# Allegro board CUTIEPI.brd
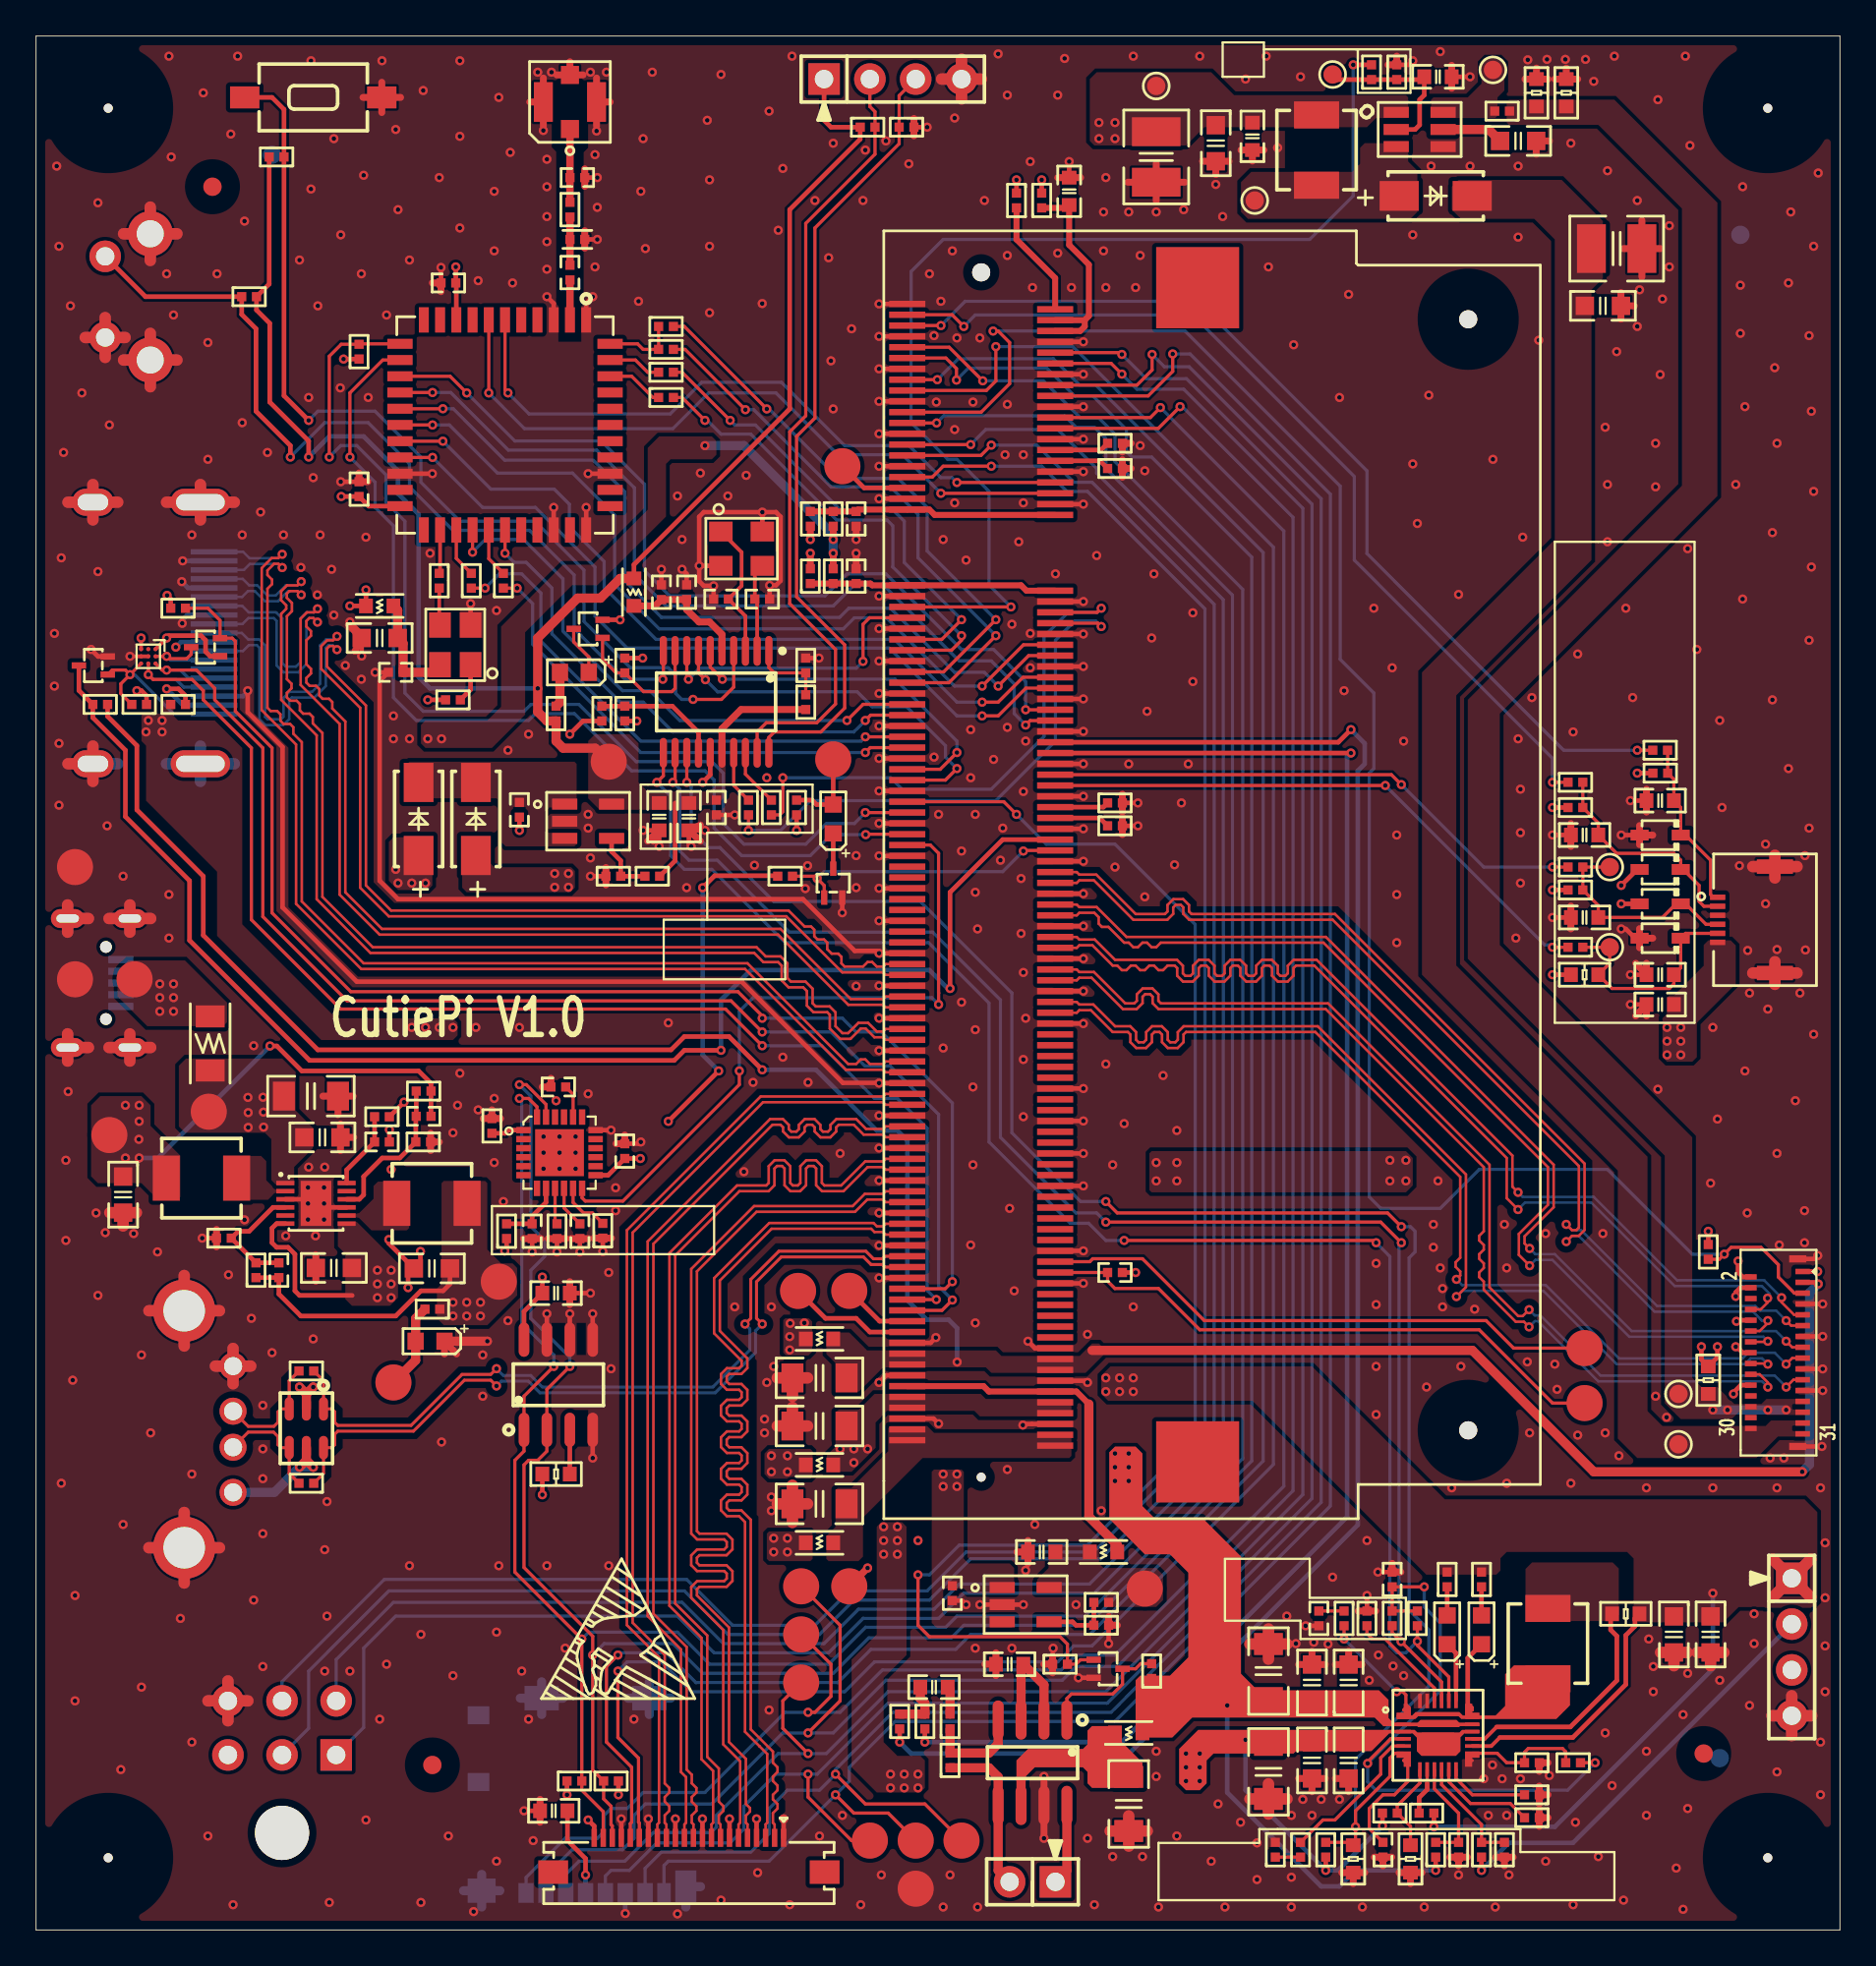
[diagram p0: board, top side]
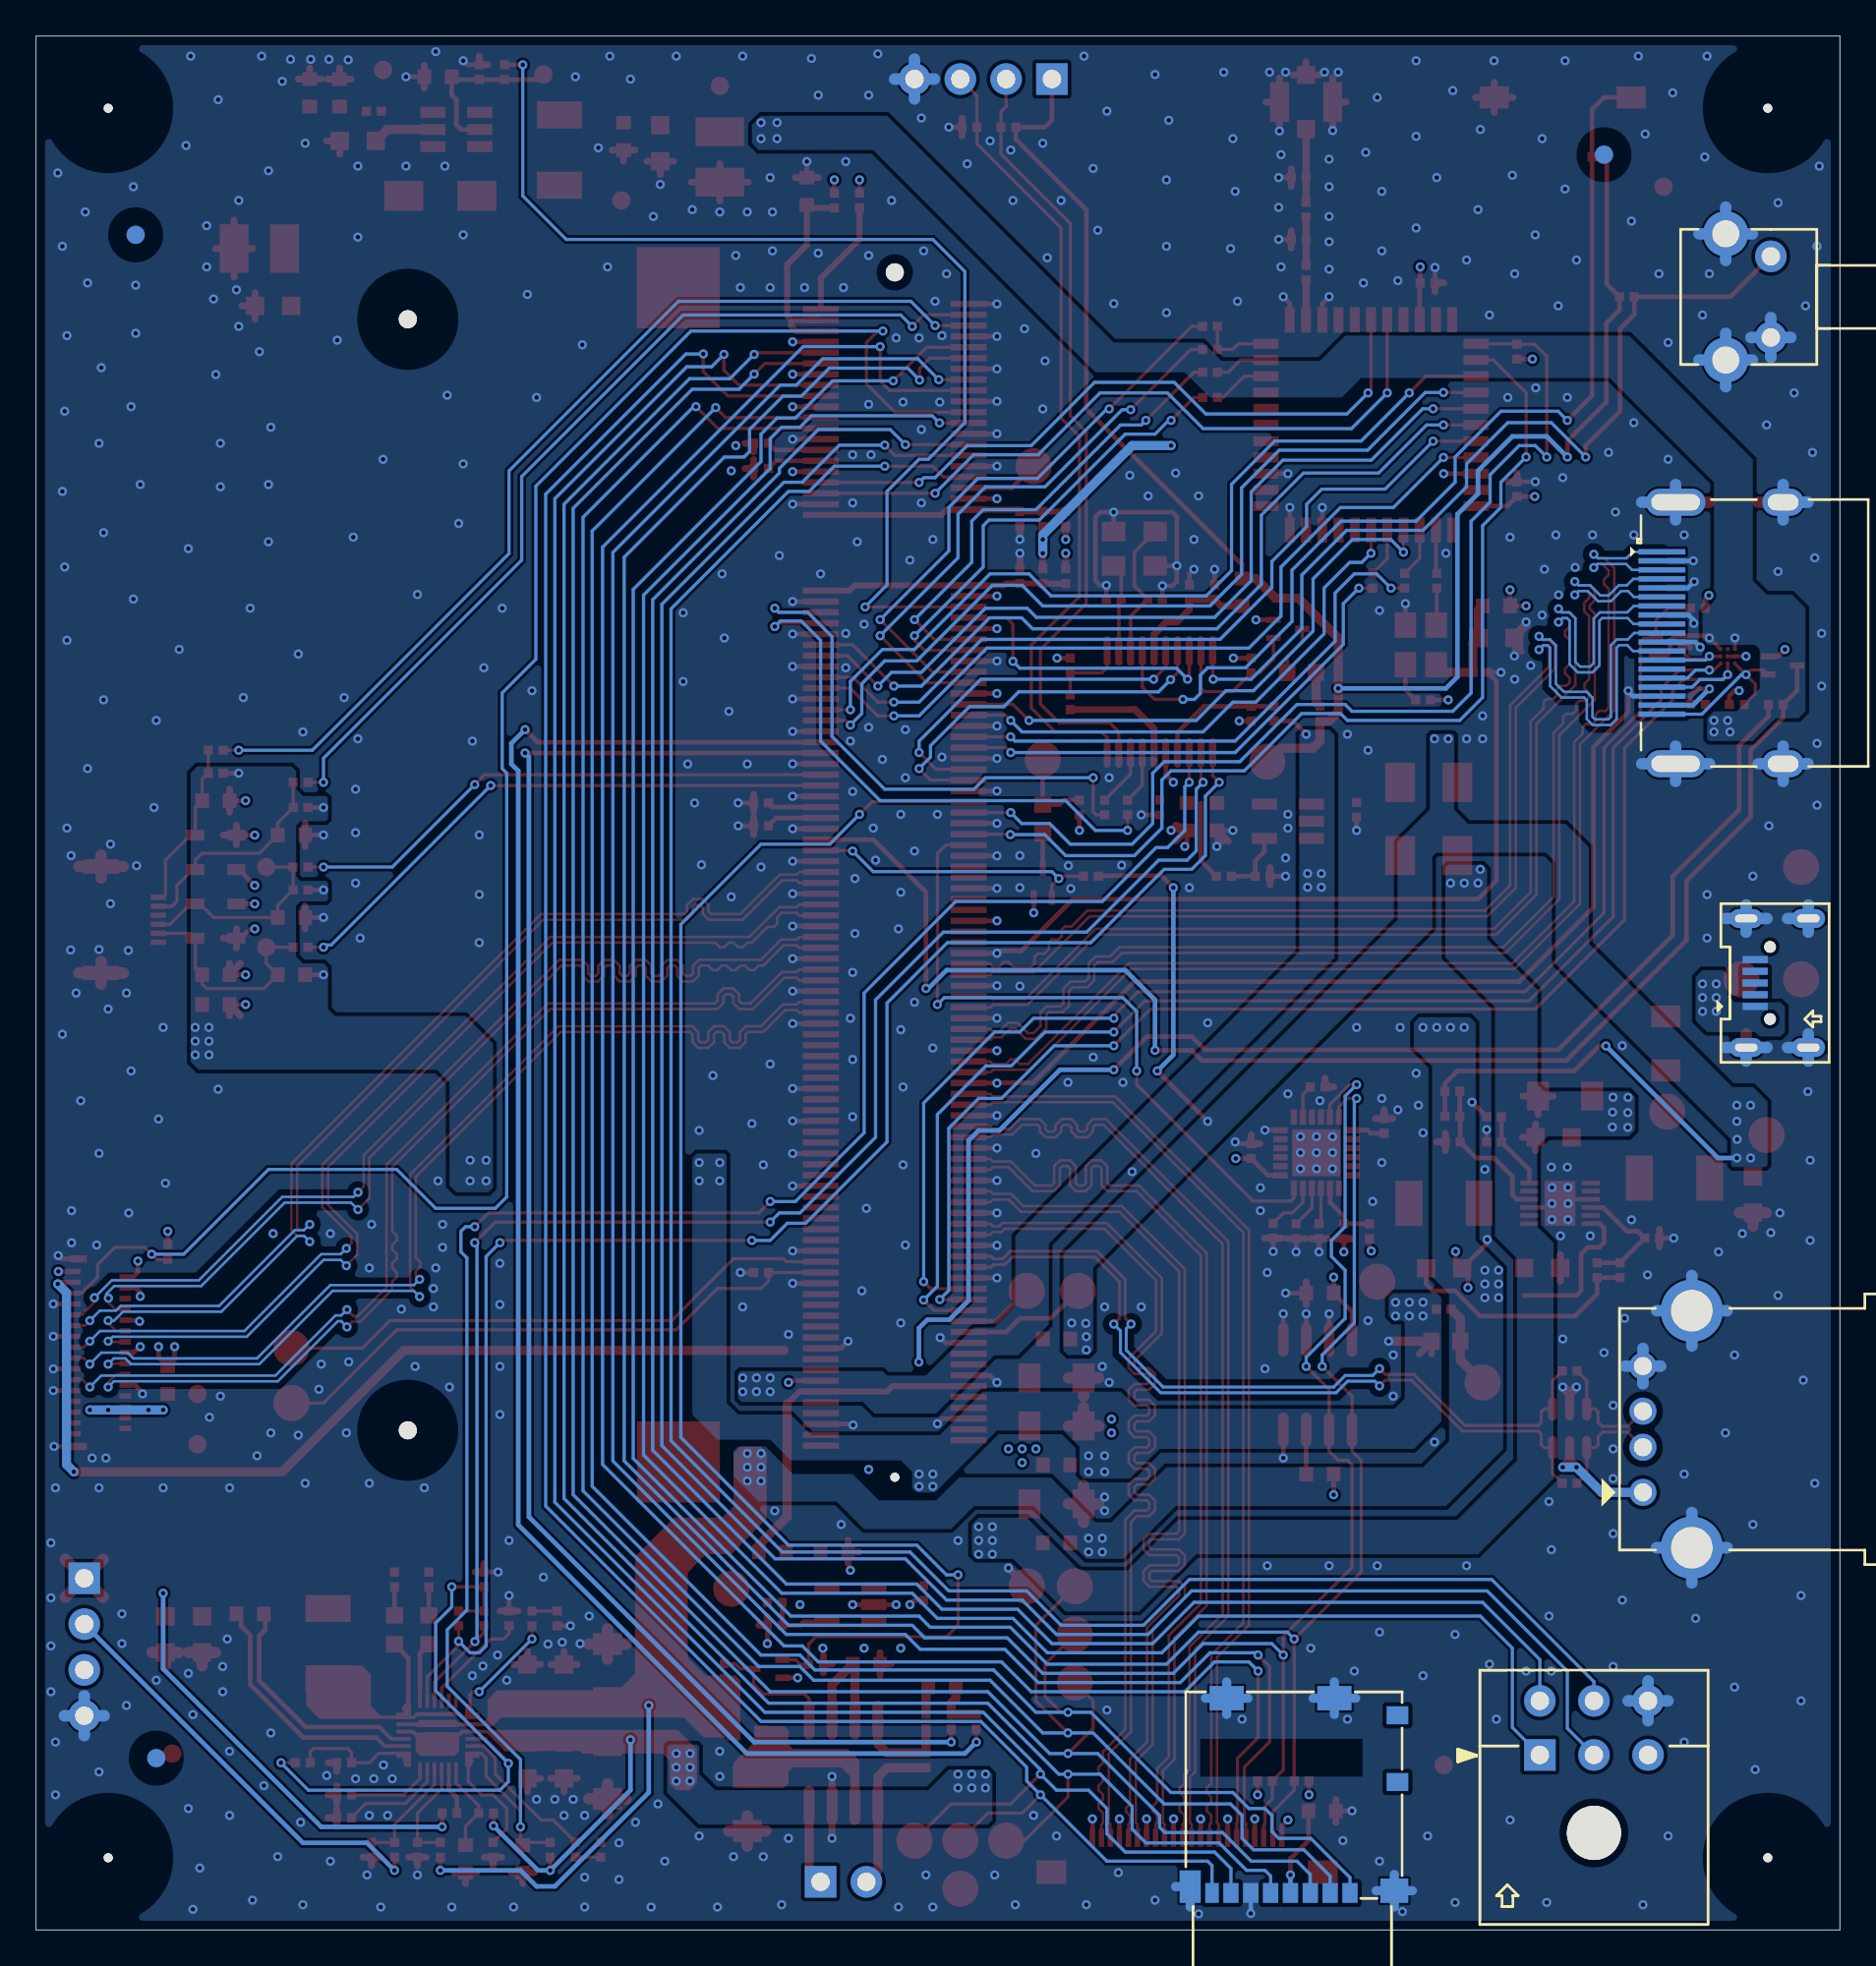
[diagram p1: board, bottom side, seen from below]

Outline 100.01 x 105 mm; copper layers: TOP, GND02, PWR03, BOTTOM. Coordinates in mm from the lower left corner of the outline.
Outline path: 0,105 0,0 100.01,0 100.01,105 0,105

## Design rules (mm)
constraint set DEFAULT: min track width 0.178
net group N12382248: nets N12382248 N12382260
net group PCM_DIN: nets N12389436 PCM_DIN
net group PCM_DOUT: nets N12389362 PCM_DOUT
net group RXD0: nets N12403489 RXD0
net group RXD1: nets N12392882 RXD1
net group TXD0: nets N12403491 TXD0
net group TXD1: nets N12392891 TXD1
net group USB_D: nets USB_DM USB_DP
net group USB_PRE: nets N1475858 N1475995
net group BOOST_EN: nets BOOST_EN CHARGE_EN N12349119
net group CAM: nets CAM1_CN CAM1_CP CAM1_DN0 CAM1_DN1 CAM1_DN2 CAM1_DN3 CAM1_DP0 CAM1_DP1 CAM1_DP2 CAM1_DP3
net group CTS1: nets CTS1 N12392875 RTS1
net group DSI: nets DSI1_CN DSI1_CP DSI1_DN0 DSI1_DN1 DSI1_DN2 DSI1_DN3 DSI1_DP0 DSI1_DP1 DSI1_DP2 DSI1_DP3
net group HDMI: nets HDMI_CK_N HDMI_CK_P HDMI_D0_N HDMI_D0_P HDMI_D1_N HDMI_D1_P HDMI_D2_N HDMI_D2_P
net group POWER: nets CM_VDAC GPIO0-27_VREF GPIO28-45_VREF HDMI_HPD_N_1V8 N12356557 VBAT VBAT_AD VBUSA VDD_CORE VDDA
net group VBUS: nets N12455651

## Placement (name value [footprint] x y rotation side)
C1  47u/6.3V  [C1206]  43.43 23.62 180 top
C2  47u/6.3V  [C1206]  15.24 46.23 0 top
C3  47u/6.3V  [C1206]  43.43 27.94 180 top
C4  1u/10V  [C0402]  50.8 18.67 270 top
C5  4.7u/16V  [C0603]  55.75 20.95 180 top
C6  100n  [C0402]  19.18 43.69 0 top
C7  10u/16V  [C0805]  16.51 36.7 180 top
C8  10u/16V  [C0805]  15.88 43.94 0 top
C10  47u/6.3V  [C1206]  43.43 30.61 180 top
C11  10u/16V  [C0805]  21.95 36.68 180 top
C12  10u/16V  [C0805]  4.83 40.77 270 top
C13  1u/10V  [C0402]  45.47 78.23 270 top
C14  1u/10V  [C0402]  45.47 75.06 90 top
C20  47u/6.3V  [C1206]  60.58 6.99 270 top
C21  NF  [C0402]  13.46 36.58 90 top
C22  NF  [C0402]  21.49 45.11 180 top
C23  4.7u/16V  [C0603]  57.28 96.39 90 top
C24  4.7u/16V  [C0603]  28.7 6.6 180 top
C68  0.1uF/50V  [C0603]  67.44 99.44 270 top
C69  1.0uF/25V  [C0805]  65.41 99.06 270 top
C73  0.1uF/50V  [C0603]  77.72 102.74 0 top
C74  0.22uF/50V  [C0805]  82.17 99.19 0 top
C76  4.7uF/50V  [C1210]  87.63 93.22 0 top
C78  0.22uF/50V  [C0805]  86.87 90.04 0 top
C80  0.1uF/50V  [C0603]  90.04 51.31 180 top
C81  0.1uF/50V  [C0603]  85.85 56.13 180 top
C82  1000pF/50V  [C0603]  90.04 52.96 180 top
C83  NC(33pF)/50V  [C0603]  90.04 62.61 180 top
C84  NC(33pF)/50V  [C0603]  85.85 60.71 180 top
C85  4.7uF/50V  [C1210]  62.1 98.3 90 top
C86  4.7u/16V  [C0603]  53.98 14.73 180 top
C87  0.39u/16V  [C0603]  49.78 13.46 0 top
C372  47u/6.3V  [C1206]  68.33 8.76 270 top
C373  100n  [C0402]  75.18 19.43 90 top
C374  100n  [C0402]  74.68 4.45 270 top
C375  10u/16V  [C0805]  70.74 9.4 270 top
C376  10u/16V  [C0805]  72.77 9.4 270 top
C377  2.2u  [C0402]  71.12 17.27 90 top
C378  10u/16V  [C0805]  72.77 13.72 90 top
C379  10u/16V  [C0805]  70.74 13.72 90 top
C380  47u/6.3V  [C1206]  68.33 14.35 90 top
C381  10u/16V  [C0805]  92.84 16.38 270 top
C382  10u/16V  [C0805]  90.81 16.38 270 top
C383  100n  [C0402]  27.5 38.74 270 top
C384  100n  [C0402]  30.15 38.74 270 top
C385  100n  [C0402]  32.64 43.18 90 top
C386  2.2n  [C0402]  28.96 46.74 0 top
C1645  0.1uF  [C0402]  19.94 69.72 180 top
C1646  270pF  [C0402]  29.6 91.89 270 top
C1647  1.5pF  [C0402]  30.01 97.16 0 top
C1648  100n  [C0402]  17.91 79.88 90 top
C1649  100n  [C0402]  22.86 91.31 180 top
C2473  10u/16V  [C0805]  19.05 71.63 0 top
C2474  1u/10V  [C0402]  36.07 74.17 90 top
C2475  12pF/50V  [C0402]  40.26 73.79 0 top
C2476  12pF/50V  [C0402]  37.97 73.79 180 top
C2477  100n  [C0402]  37.72 62.23 270 top
C2478  4.7u/16V  [C0603]  36.2 61.72 270 top
C2479  10n  [C0402]  34.67 74.17 90 top
C2480  1u/10V  [C0402]  26.8 62.1 270 top
C2481  4.7u/16V  [C0603]  34.54 61.72 270 top
C2482  0.1uF/50V  [C0603]  28.83 35.31 0 top
D1  RED  [LED0603]  21.84 32.64 0 top
D2  GREEN  [LED0603]  44.2 61.59 270 top
D10  SS14-M3/61T  [DO-214AC]  77.6 96.14 180 top
D11  ESDLIN1524BJ  [SOD323]  90.04 58.79 0 top
D12  ESDLIN1524BJ  [SOD323]  90.04 60.7 0 top
D13  ESDLIN1524BJ  [SOD323]  90.04 54.98 0 top
D14  ESDLIN1524BJ  [SOD323]  90.04 56.89 0 top
D15  GREEN  [LED0603]  80.14 16.64 270 top
D16  GREEN  [LED0603]  78.23 16.64 270 top
D17  SS14-M3/61T  [DO-214AC]  21.21 61.59 270 top
D18  SS14-M3/61T  [DO-214AC]  24.38 61.59 270 top
D19  GREEN  [LED0603]  29.84 69.72 0 top
F1  6V/2A  [1206]  9.65 49.15 270 top
FB2  BLM18PG121SH1  [SL0603]  60.58 10.92 180 top
FB3  BLM18PG121SH1  [SL0603]  43.43 21.46 0 top
FB4  BLM18PG121SH1  [SL0603]  43.43 25.78 0 top
FB5  BLM18PG121SH1  [SL0603]  43.43 32.77 0 top
FB6  BLM18PG121SH1  [SL0603]  59.18 20.95 0 top
FB7  BLM18PG121SH1  [SL0603]  33.15 74.17 270 top
FB8  BLM18PG121SH1  [SL0603]  19.05 73.41 180 top
J1  DDR2 SODIMM  [FCI_10033853_CM]  52.4 58.5 90 top
J2  Micro-USB  [MICROUSB]  4.7 52.5 90 bottom
J7  2.54*4  [2MM54_4]  43.69 102.62 0 top
J9  2.54*2  [2MM54_2]  56.52 2.67 180 top
J11  54548-2271  [MOLEX_54548-2271]  36.2 5.11 0 top
J13  47151-1051  [MOLEX_47151-1051]  6.13 71.9 90 bottom
J14  61400416021  [WURTH_61400416021]  10.92 27.76 0 bottom
J16  1040310811  [MOLEX_1040310811]  30.27 7 180 bottom
J17  FH52-6S-0.5SH  [CONFPC6_05MM_FH52]  94.82 56 90 top
J18  2.54*4_NC  [2MM54_4]  97.34 19.5 270 top
J20  2.54*4_NC  [2MM54_3X2]  16.64 12.7 180 bottom
J21  CON31  [CONFPC31_03MM_FH26W]  96.5 32 90 top
L1  4.7u/16V  [SHC0402]  21.95 40.28 0 top
L2  4.7u/16V  [SHC0402]  9.17 41.68 180 top
L5  10uH/20%  [SHC0402]  70.99 98.68 270 top
L6  1.5u  [SHC0402]  83.82 15.88 90 top
L527  2.7nH/0.3nH  [L0402]  30.01 93.73 0 top
NOREF  -  [unnamed]  21.97 9.14 0 top
NOREF#2  -  [#2]  4 4 0 top
NOREF#3  -  [#2]  4 4 0 top
NOREF#4  -  [unnamed#2]  96.01 4 0 top
NOREF#5  -  [#2]  -1.57 64.5 90 top
NOREF#6  -  [#2]  96.01 4 90 top
NOREF#7  -  [#2]  96.01 4 90 top
NOREF#8  -  [unnamed]  92.46 9.78 0 top
NOREF#9  -  [unnamed#2]  96.01 101 0 top
NOREF#10  -  [#2]  0 105 0 top
NOREF#11  -  [unnamed]  9.78 96.65 0 top
NOREF#12  -  [#2]  -2.18 20.26 90 top
NOREF#13  -  [#2]  24.86 -2.2 0 top
NOREF#14  -  [#2]  27.81 12.7 0 top
NOREF#15  -  [#2]  0 105 0 top
NOREF#16  -  [#2]  7.31 0.3 0 top
NOREF#17  -  [#2]  0 0 90 top
NOREF#18  -  [unnamed]  4 4 0 top
NOREF#19  -  [unnamed#2]  4 101 0 top
NOREF#20  -  [#2]  0.6 48.1 90 top
NOREF#21  -  [#2]  0 0 90 top
NOREF#22  -  [unnamed]  93.34 9.53 180 bottom
NOREF#23  -  [unnamed]  94.49 93.98 180 bottom
NOREF#24  -  [unnamed]  13.08 98.42 180 bottom
PP1  PP_SMT_ROUND_2MM  [PP_SMT_R2MM]  5.46 52.7 270 top
PP2  PP_SMT_ROUND_2MM  [PP_SMT_R2MM]  25.65 35.94 180 top
PP3  PP_SMT_ROUND_2MM  [PP_SMT_R2MM]  9.58 45.36 270 top
PP4  PP_SMT_ROUND_2MM  [PP_SMT_R2MM]  61.47 18.92 0 top
PP5  PP_SMT_ROUND_2MM  [PP_SMT_R2MM]  2.16 58.93 0 top
PP6  PP_SMT_ROUND_2MM  [PP_SMT_R2MM]  4.06 44.07 180 top
PP7  PP_SMT_ROUND_2MM  [PP_SMT_R2MM]  19.81 30.35 0 top
PP8  PP_SMT_ROUND_2MM  [PP_SMT_R2MM]  2.16 52.7 0 top
PP9  PP_SMT_ROUND_2MM  [PP_SMT_R2MM]  44.2 64.9 0 top
PP12  PP_SMT_ROUND_2MM  [PP_SMT_R2MM]  42.42 16.38 0 top
PP13  PP_SMT_ROUND_2MM  [PP_SMT_R2MM]  42.42 19.05 0 top
PP14  PP_SMT_ROUND_2MM  [PP_SMT_R2MM]  42.42 13.72 0 top
PP15  PP_SMT_ROUND_2MM  [PP_SMT_R2MM]  46.23 4.95 0 top
PP16  PP_SMT_ROUND_2MM  [PP_SMT_R2MM]  51.31 4.95 0 top
PP17  PP_SMT_ROUND_2MM  [PP_SMT_R2MM]  48.77 4.95 0 top
PP18  PP_SMT_ROUND_2MM  [PP_SMT_R2MM]  48.77 2.29 0 top
PP19  PP_SMT_ROUND_2MM  [PP_SMT_R2MM]  45.09 19.05 0 top
PP20  PP_SMT_ROUND_2MM  [PP_SMT_R2MM]  85.85 32.26 0 top
PP21  PP_SMT_ROUND_2MM  [PP_SMT_R2MM]  85.85 29.21 0 top
PP22  PP_SMT_ROUND_2MM  [PP_SMT_R2MM]  42.25 35.43 0 top
PP23  PP_SMT_ROUND_2MM  [PP_SMT_R2MM]  31.75 64.77 90 top
PP24  PP_SMT_ROUND_2MM  [PP_SMT_R2MM]  45.09 35.43 0 top
PP25  PP_SMT_ROUND_2MM  [PP_SMT_R2MM]  44.7 81.15 0 top
Q2  DMG1012T  [SOT50P160X90-3N]  44.2 58.04 90 top
Q3  DMG1012T  [SOT50P160X90-3N]  9.4 71.12 180 top
Q4  DMG1012T  [SOT50P160X90-3N]  3.17 70.1 180 top
Q5  DMG1012T  [SOT50P160X90-3N]  30.61 72.14 180 top
Q6  DMG1012T  [SOT50P160X90-3N]  59.44 14.48 0 top
R2  100K  [R0402]  19.18 45.09 180 top
R3  470R  [R0402]  21.97 34.42 180 top
R7  0  [R0402]  42.93 78.23 270 top
R8  0  [R0402]  42.93 75.06 90 top
R9  470R  [R0402]  42.16 62.23 90 top
R10  10K  [R0402]  41.53 58.42 0 top
R12  4.7K  [C0402]  59.82 36.45 180 top
R15  NF  [R0402]  7.87 73.28 180 top
R16  4.7K  [R0402]  31.88 8.26 180 top
R17  4.7K  [R0402]  29.84 8.26 0 top
R18  10K  [R0402]  3.56 67.94 180 top
R22  0  [R0402]  12.19 36.58 90 top
R23  0  [R0402]  21.49 46.51 180 top
R24  NF  [R0402]  21.46 43.69 0 top
R25  NF  [R0402]  10.41 38.35 180 top
R26  100K  [R0402]  59.82 81.03 0 top
R27  100K  [R0402]  59.82 82.42 0 top
R28  100K  [R0402]  59.82 61.21 0 top
R29  100K  [R0402]  59.82 62.48 0 top
R30  10K  [R0402]  54.36 95.89 270 top
R31  0  [R0402]  55.75 95.89 90 top
R32  0_NC  [R0402]  44.2 78.23 270 top
R33  0_NC  [R0402]  44.2 75.06 90 top
R42  0  [R0402]  85.34 63.63 180 top
R43  0  [R0402]  90.04 65.41 180 top
R74  4.7K/5%  [R0603]  28.83 25.27 0 top
R87  10K  [R0402]  75.44 103 270 top
R88  0  [R0402]  74.04 103 90 top
R89  0  [R0402]  81.28 100.84 180 top
R90  3.3/1%  [R0603]  84.84 101.85 90 top
R91  3.3/1%  [R0603]  83.19 101.85 90 top
R110  39.2K  [R0402]  59.05 18.16 180 top
R112  36.5K  [R0402]  59.05 16.89 180 top
R114  4.7K  [R0402]  85.34 62.23 180 top
R115  4.7K  [R0402]  90.05 64.14 180 top
R117  10K  [R0402]  85.34 57.66 0 top
R118  NC(10k)/1%  [R0603]  85.85 52.96 0 top
R120  0  [R0402]  85.34 54.48 180 top
R121  0  [R0402]  85.34 58.93 180 top
R122  0_NC  [R0402]  14.99 24.77 180 top
R123  0_NC  [R0402]  14.99 30.99 180 top
R124  4.7K  [R0402]  61.85 14.35 90 top
R125  20K  [R0402]  50.67 9.4 90 top
R126  20K  [R0402]  50.67 11.56 90 top
R127  0  [R0402]  47.88 11.56 90 top
R128  0_NC  [R0402]  49.28 11.56 90 top
R272  10K  [R0402]  13.34 98.3 180 top
R347  15K  [R0402]  75.06 6.48 180 top
R348  5.1K  [R0603]  76.2 3.94 90 top
R351  10K  [R0402]  73.79 17.27 270 top
R354  10K  [R0402]  85.22 9.27 180 top
R355  10K  [R0402]  82.93 9.27 180 top
R357  82.5K  [R0402]  82.93 6.22 180 top
R358  39.2K  [R0402]  82.93 7.49 180 top
R359  2.49K  [R0402]  72.52 17.27 270 top
R360  31.6K  [R0402]  77.6 4.45 90 top
R361  10K  [R0402]  78.87 4.45 90 top
R362  20m  [R0603]  88.14 17.53 0 top
R363  2.49K  [R0402]  80.14 19.43 90 top
R364  2.49K  [R0402]  78.23 19.43 90 top
R365  2.49K  [R0402]  77.09 6.48 0 top
R366  10K  [R0402]  81.41 4.45 90 top
R367  10K  [R0402]  80.14 4.45 90 top
R368  10K  [R0402]  25.27 44.58 270 top
R370  0  [R0402]  26.09 38.74 90 top
R371  10K  [R0402]  31.42 38.76 90 top
R373  0  [R0402]  28.88 38.74 90 top
R2435  0  [R0402]  29.6 95.38 90 top
R2436  10K  [R0402]  17.91 87.5 90 top
R2437  0  [R0402]  22.35 74.8 270 top
R3032  10K  [R0402]  23.11 68.2 180 top
R3033  0  [R0402]  24.13 74.8 90 top
R3034  0  [R0402]  25.91 74.8 90 top
R3035  0_NC  [R0402]  34.92 87.63 0 top
R3036  0  [R0402]  34.92 88.9 0 top
R3037  0  [R0402]  34.92 86.36 0 top
R3038  0  [R0402]  34.92 84.96 0 top
R3039  10K  [R0402]  42.67 70.1 90 top
R3040  10K_NC  [R0402]  42.67 68.07 270 top
R3041  0  [R0402]  39.5 62.23 90 top
R3042  0  [R0402]  40.77 62.23 90 top
R3043  10K  [R0402]  46.1 99.95 0 top
R3044  10K  [R0402]  48.26 99.95 0 top
R3045  10K  [R0402]  75.18 17.27 90 top
R3046  10K  [R0402]  76.58 17.27 90 top
R3047  5.1K  [R0603]  73.03 3.94 90 top
R3048  15K  [R0402]  71.5 4.45 270 top
R3049  52.3K  [R0402]  34.16 58.42 180 top
R3051  30.1K  [R0402]  32 58.42 0 top
R3052  15K  [R0402]  31.37 67.44 270 top
R3053  52.3K  [R0402]  32.64 67.44 270 top
R3054  10K  [R0402]  11.81 90.55 0 top
R3055  10K  [R0402]  70.1 4.45 90 top
R3056  10K  [R0402]  68.71 4.45 90 top
R3057  10K  [R0402]  92.71 37.59 270 top
R3058  0  [R0402]  7.87 67.94 180 top
R3059  10K  [R0402]  32.64 70.1 270 top
R3060  470R  [R0402]  28.83 67.44 90 top
R3061  10K  [R0402]  56.77 14.73 0 top
R3062  10K  [R0402]  5.71 67.94 180 top
R3063  3.3/1%_NC  [R0603]  92.71 30.48 90 top
SW1  Switch  [SWITCH-R]  15.37 101.6 180 top
SW2  Switch  [SWITCH-P]  5.08 90.54 90 bottom
SW16  734120110  [ANT_CIRCLE]  29.6 101.35 0 top
TP28  TEST POINT  [TESTPOINT_39MIL]  87.25 58.93 90 top
TP29  TEST POINT  [TESTPOINT_39MIL]  87.25 54.48 90 top
TP30  TEST POINT  [TESTPOINT_39MIL]  62.1 102.23 270 top
TP31  TEST POINT  [TESTPOINT_39MIL]  71.88 102.87 180 top
TP32  TEST POINT  [TESTPOINT_39MIL]  67.56 95.89 180 top
TP33  TEST POINT  [TESTPOINT_39MIL]  91.06 26.92 0 top
TP34  TEST POINT  [TESTPOINT_39MIL]  80.77 103.12 0 top
TP35  TEST POINT  [TESTPOINT_39MIL]  91.06 29.72 0 top
U1  PAM2306AYPKE  [DIODES_PAM2306]  15.52 40.28 0 top
U2  TPS73633DBVR  [SOT23_5]  54.86 18.03 270 top
U4  ESD5384_NC  [ONSEMI_ESD5384]  6.22 70.61 270 top
U5  IP4234CZ6  [TSOP6]  14.99 27.81 180 top
U6  TPS61165DBV  [SOT23_6B]  76.71 99.82 270 top
U12  LM4871MX  [SOIC8_1D27MM]  55.24 9.27 180 top
U18  stm32f030f4p6  [TSSOP20_0D65MM]  37.7 68.09 180 top
U57  MPU6050  [QFN24_05MM_0404MML]  29.02 43.09 0 top
U58  MP2636GR  [QFN-30]  77.72 10.79 0 top
U59  RTL8723BS  [MOD44_RTL8723BS]  26 83.44 270 top
U60  TPS73633DBVR  [SOT23_5]  30.61 61.47 270 top
U61  LM75AD  [SO8]  28.96 30.23 0 top
Y2  25M  [XTAL-3225_25M]  39.12 76.58 180 top
Y9  32.768KHz_AUZ3200003  [XTAL-3225_32K]  23.24 71.25 90 top

## Library data of the parts
C1-C3 C10 C20 C372 C380 = CAP_3216_6.3V_47u: Tolerance: tol*
C4 C13 C14 C2480 = CAP_1005_6.3V_1u
C5 C23 C24 C86 C87 C2478 C2481 = CAP_1608_6.3V_4.7u: Tolerance: tol*
C6 C373 C374 C377 C383-C386 C1648 C1649 C2474 C2477 C2479 = CAP_1005_6.3V_100n
C7 C8 C11 C12 C375 C376 C378 C379 C381 C382 = CAP_2012_6.3V_10u: Tolerance: tol*
C21 C22 = CAP_1005_NF
C68 C69 C73 C74 C76 C78 C82-C85 C2482 = CAP: Tolerance: tol*
C80 C81 = CAP_0: Tolerance: tol*
C1645-C1647 = C_0
C2473 = C_0: Tolerance: tol*
C2475 C2476 = C_0603_22P/50V/5%
D1 = LED_1608_RED
D2 D15 D16 D19 = LED_1608_GREEN
D10 D17 D18 = S100: User Part Number: pn
D11-D14 = SMAJ30CA: User Part Number: PN
F1 = FUSE_POLY_2.0A_6V: Tolerance: tol*
FB2-FB7 = INDUCTOR_0: Tolerance: tol*; room: USB+5V
FB8 = BEAD_0: Tolerance: tol*
J1 = CON_200W_DDR2SODIMM_CM
J2 = CON_uUSB_B: User Part Number: PN
J7 J18 = A2002WV-6P_7: User Part Number: pn
J9 = A2002WV-6P_8: User Part Number: pn
J11 = CON_22W_FFC_54548-2271
J13 = CON_HDMI_RA
J14 = CON_USBA_RA_PTH
J16 = CON_uSD_0
J17 = A2002WV-6P_3: User Part Number: PN
J20 = A2002WV-6P_2: User Part Number: pn
J21 = CON32_1: User Part Number: PN
L1 L2 L6 = IND_4u7_SRN4018-4R7M: User Part Number: pn
L5 = IND: User Part Number: pn
L527 = INDUCTOR
PP1-PP9 PP12-PP25 = PP_SMT_ROUND_2MM
Q2-Q6 = MOSFET_N_DMG1012T
R2 R10 R18 R26-R29 R3059 R3061 R3062 = RES_1005_100K
R3 R9 R3060 = RES_1005_470R
R7 R8 R31-R33 = RES_2012_0R
R12 = RES_1005_1K
R15 = RES_1005_27K
R16 R17 = RES_1005_1.8K
R22 R23 = RES_1005_0R
R24 R25 = RES_1005_NF
R30 = RES_1005_47K
R42 R43 R87-R89 R120-R123 R127 R128 R347 R351 R354 R355 R357-R361 R363-R368 R370 R371 R373 R2436 R3048 R3052 R3055-R3057 = RES
R74 = R_0603_4K7/5%: Tolerance: tol*; room: 8
R90 R91 R348 R362 R3047 R3063 = RES: Tolerance: tol*
R110 R112 R114 R115 R117 R124-R126 R3049 R3051 R3053 = RES_0
R118 = RES_0: Tolerance: tol*
R272 R3054 = R_0603_10K/5%
R2435 R3033-R3038 R3041 R3042 R3045 R3046 R3058 = R_1: signal model: DEFAULT_RESISTOR_0.001OHM_1_2
R2437 R3032 R3039 R3040 = R_0402_22R/5%
R3043 R3044 = R_0603/4.7K/5%
SW1 = SKEG_DIP2: User Part Number: pn
SW2 = SKEG_DIP2_1: User Part Number: PN
SW16 = RF_4
TP28-TP35 = Test pad: Tolerance: *; User Part Number: *; room: P10-PMIC
U1 = IC_SMPS_DUAL_1A_3V3_2
U2 U60 = LP3470/SOT23_1
U4 = IC_ESD5384_1
U5 = TMP100-Q1_0: User Part Number: pn
U6 = TPS61165TDB
U12 = SMD_EEPROM_SO8_0: User Part Number: pn
U18 = XF6000SYE_1: User Part Number: pn
U57 = TUSB1210BRHBT_2: User Part Number: PN
U58 = STM8AF6226TA_5: User Part Number: PN
U59 = STM8AF6226TA_9: User Part Number: PN
U61 = LM75AD: User Part Number: pn; room: 8
Y2 = X_0
Y9 = XTAL-3225-4P-TXC_0

## Footprints (pads in the part's own frame, mm; a bottom-side part is the same pattern mirrored in y, then rotated)
2MM54_2
  rect 1.75x1.75 hole 1.02: 1(0,0)
  round 1.75 hole 1.02: 2(2.54,0)
2MM54_3X2
  round 3 hole 3 unplated: (3,-7.32)
  rect 1.75x1.75 hole 1.02: 1(0,-3)
  round 1.75 hole 1.02: 2(0,0) 3(3,-3) 4(3,0) 5(6,-3) 6(6,0)
2MM54_4
  rect 1.75x1.75 hole 1.02: 1(0,0)
  round 1.75 hole 1.02: 2(2.54,0) 3(5.08,0) 4(7.62,0)
1206
  rect 1.219x1.6 smd: 1(-1.5,0) 2(1.5,0)
ANT_CIRCLE
  rect 1x1 smd: 1(0,-1.5) 4(0,1.5)
  rect 1.05x2.2 smd: 2(-1.475,0) 3(1.475,0)
C0402
  rect 0.508x0.508 smd: 1(-0.41,0) 2(0.41,0)
C0603
  rect 0.762x0.813 smd: 1(-0.76,0) 2(0.76,0)
C0805
  rect 1.016x1.016 smd: 1(-1,0) 2(1,0)
C1206
  rect 1.219x1.6 smd: 1(-1.5,0) 2(1.5,0)
C1210
  rect 1.6x2.692 smd: 1(-1.4,0) 2(1.4,0)
CONFPC6_05MM_FH52
  rect 0.3x0.85 smd: 1(1.25,1.587) 2(0.75,1.587) 3(0.25,1.587) 4(-0.25,1.587) 5(-0.75,1.587) 6(-1.25,1.587)
  rect 0.8x2 smd: 7(-2.95,-1.587) 8(2.95,-1.587)
CONFPC31_03MM_FH26W
  rect 0.3x0.8 smd: 1(4.5,-1.437) 3(3.9,-1.437) 5(3.3,-1.437) 7(2.7,-1.437) 9(2.1,-1.437) 11(1.5,-1.437) 13(0.9,-1.437) 15(0.3,-1.437) 17(-0.3,-1.437) 19(-0.9,-1.437) 21(-1.5,-1.437) 23(-2.1,-1.437) 25(-2.7,-1.437) 27(-3.3,-1.437) 29(-3.9,-1.437) 31(-4.5,-1.437)
  rect 0.3x0.65 smd: 2(4.2,1.437) 4(3.6,1.437) 6(3,1.437) 8(2.4,1.437) 10(1.8,1.437) 12(1.2,1.437) 14(0.6,1.437) 16(0,1.437) 18(-0.6,1.437) 20(-1.2,1.437) 22(-1.8,1.437) 24(-2.4,1.437) 26(-3,1.437) 28(-3.6,1.437) 30(-4.2,1.437)
  rect 0.4x0.95 smd: G1(-5.2,-1.165) G2(5.2,-1.165)
DIODES_PAM2306
  rect 1x0.25 smd: 1(-1.7,1.125) 2(-1.7,0.675) 3(-1.7,0.225) 4(-1.7,-0.225) 5(-1.7,-0.675) 6(-1.7,-1.125) 7(1.7,-1.125) 8(1.7,-0.675) 9(1.7,-0.225) 10(1.7,0.225) 11(1.7,0.675) 12(1.7,1.125)
  rect 1.7x2.5 smd: 13(0,0)
DO-214AC
  rect 2.17x1.65 smd: A(2.025,0) C(-2.025,0)
FCI_10033853_CM
  round 0.5 hole 1.1 unplated: (-33.4,0)
  rect 4.5x4.6 smd: (-32.55,-12) (32.55,-12)
  round 1 hole 2.4 unplated: (-30.8,-27) (30.8,-27)
  round 1 hole 1.6 unplated: (33.4,0)
  rect 0.35x2 smd: 1(31.65,4.1) 2(31.35,-4.1) 3(31.05,4.1) 4(30.75,-4.1) 5(30.45,4.1) 6(30.15,-4.1) 7(29.85,4.1) 8(29.55,-4.1) 9(29.25,4.1) 10(28.95,-4.1) 11(28.65,4.1) 12(28.35,-4.1) 13(28.05,4.1) 14(27.75,-4.1) 15(27.45,4.1) 16(27.15,-4.1) 17(26.85,4.1) 18(26.55,-4.1) 19(26.25,4.1) 20(25.95,-4.1) 21(25.65,4.1) 22(25.35,-4.1) 23(25.05,4.1) 24(24.75,-4.1) 25(24.45,4.1) 26(24.15,-4.1) 27(23.85,4.1) 28(23.55,-4.1) 29(23.25,4.1) 30(22.95,-4.1) 31(22.65,4.1) 32(22.35,-4.1) 33(22.05,4.1) 34(21.75,-4.1) 35(21.45,4.1) 36(21.15,-4.1) 37(20.85,4.1) 38(20.55,-4.1) 39(20.25,4.1) 40(19.95,-4.1) 41(16.05,4.1) 42(15.75,-4.1) 43(15.45,4.1) 44(15.15,-4.1) 45(14.85,4.1) 46(14.55,-4.1) 47(14.25,4.1) 48(13.95,-4.1) 49(13.65,4.1) 50(13.35,-4.1) 51(13.05,4.1) 52(12.75,-4.1) 53(12.45,4.1) 54(12.15,-4.1) 55(11.85,4.1) 56(11.55,-4.1) 57(11.25,4.1) 58(10.95,-4.1) 59(10.65,4.1) 60(10.35,-4.1) 61(10.05,4.1) 62(9.75,-4.1) 63(9.45,4.1) 64(9.15,-4.1) 65(8.85,4.1) 66(8.55,-4.1) 67(8.25,4.1) 68(7.95,-4.1) 69(7.65,4.1) 70(7.35,-4.1) 71(7.05,4.1) 72(6.75,-4.1) 73(6.45,4.1) 74(6.15,-4.1) 75(5.85,4.1) 76(5.55,-4.1) 77(5.25,4.1) 78(4.95,-4.1) 79(4.65,4.1) 80(4.35,-4.1) 81(4.05,4.1) 82(3.75,-4.1) 83(3.45,4.1) 84(3.15,-4.1) 85(2.85,4.1) 86(2.55,-4.1) 87(2.25,4.1) 88(1.95,-4.1) 89(1.65,4.1) 90(1.35,-4.1) 91(1.05,4.1) 92(0.75,-4.1) 93(0.45,4.1) 94(0.15,-4.1) 95(-0.15,4.1) 96(-0.45,-4.1) 97(-0.75,4.1) 98(-1.05,-4.1) 99(-1.35,4.1) 100(-1.65,-4.1) 101(-1.95,4.1) 102(-2.25,-4.1) 103(-2.55,4.1) 104(-2.85,-4.1) 105(-3.15,4.1) 106(-3.45,-4.1) 107(-3.75,4.1) 108(-4.05,-4.1) 109(-4.35,4.1) 110(-4.65,-4.1) 111(-4.95,4.1) 112(-5.25,-4.1) 113(-5.55,4.1) 114(-5.85,-4.1) 115(-6.15,4.1) 116(-6.45,-4.1) 117(-6.75,4.1) 118(-7.05,-4.1) 119(-7.35,4.1) 120(-7.65,-4.1) 121(-7.95,4.1) 122(-8.25,-4.1) 123(-8.55,4.1) 124(-8.85,-4.1) 125(-9.15,4.1) 126(-9.45,-4.1) 127(-9.75,4.1) 128(-10.05,-4.1) 129(-10.35,4.1) 130(-10.65,-4.1) 131(-10.95,4.1) 132(-11.25,-4.1) 133(-11.55,4.1) 134(-11.85,-4.1) 135(-12.15,4.1) 136(-12.45,-4.1) 137(-12.75,4.1) 138(-13.05,-4.1) 139(-13.35,4.1) 140(-13.65,-4.1) 141(-13.95,4.1) 142(-14.25,-4.1) 143(-14.55,4.1) 144(-14.85,-4.1) 145(-15.15,4.1) 146(-15.45,-4.1) 147(-15.75,4.1) 148(-16.05,-4.1) 149(-16.35,4.1) 150(-16.65,-4.1) 151(-16.95,4.1) 152(-17.25,-4.1) 153(-17.55,4.1) 154(-17.85,-4.1) 155(-18.15,4.1) 156(-18.45,-4.1) 157(-18.75,4.1) 158(-19.05,-4.1) 159(-19.35,4.1) 160(-19.65,-4.1) 161(-19.95,4.1) 162(-20.25,-4.1) 163(-20.55,4.1) 164(-20.85,-4.1) 165(-21.15,4.1) 166(-21.45,-4.1) 167(-21.75,4.1) 168(-22.05,-4.1) 169(-22.35,4.1) 170(-22.65,-4.1) 171(-22.95,4.1) 172(-23.25,-4.1) 173(-23.55,4.1) 174(-23.85,-4.1) 175(-24.15,4.1) 176(-24.45,-4.1) 177(-24.75,4.1) 178(-25.05,-4.1) 179(-25.35,4.1) 180(-25.65,-4.1) 181(-25.95,4.1) 182(-26.25,-4.1) 183(-26.55,4.1) 184(-26.85,-4.1) 185(-27.15,4.1) 186(-27.45,-4.1) 187(-27.75,4.1) 188(-28.05,-4.1) 189(-28.35,4.1) 190(-28.65,-4.1) 191(-28.95,4.1) 192(-29.25,-4.1) 193(-29.55,4.1) 194(-29.85,-4.1) 195(-30.15,4.1) 196(-30.45,-4.1) 197(-30.75,4.1) 198(-31.05,-4.1) 199(-31.35,4.1) 200(-31.65,-4.1)
L0402
  rect 0.508x0.508 smd: 1(-0.41,0) 2(0.41,0)
LED0603
  rect 0.9x0.95 smd: 1(0.8,0) 2(-0.8,0)
MICROUSB
  round 0.65 hole 0.65 unplated: (-2,-0.825) (2,-0.825)
  rect 0.4x1.4 smd: 1(-1.3,0) 2(-0.65,0) 3(0,0) 4(0.65,0) 5(1.3,0)
  oval 1.05x1.85 hole 0.45x1.25: 6(-3.575,0.5) 7(3.575,0.5) 8(-3.575,-2.95) 9(3.575,-2.95)
MOD44_RTL8723BS
  rect 1.4x0.55 smd: 1(-5.825,4.5) 2(-5.825,3.6) 3(-5.825,2.7) 4(-5.825,1.8) 5(-5.825,0.9) 6(-5.825,0) 7(-5.825,-0.9) 8(-5.825,-1.8) 9(-5.825,-2.7) 10(-5.825,-3.6) 11(-5.825,-4.5) 23(5.825,-4.5) 24(5.825,-3.6) 25(5.825,-2.7) 26(5.825,-1.8) 27(5.825,-0.9) 28(5.825,0) 29(5.825,0.9) 30(5.825,1.8) 31(5.825,2.7) 32(5.825,3.6) 33(5.825,4.5)
  rect 0.55x1.4 smd: 12(-4.5,-5.825) 13(-3.6,-5.825) 14(-2.7,-5.825) 15(-1.8,-5.825) 16(-0.9,-5.825) 17(0,-5.825) 18(0.9,-5.825) 19(1.8,-5.825) 20(2.7,-5.825) 21(3.6,-5.825) 22(4.5,-5.825) 34(4.5,5.825) 35(3.6,5.825) 36(2.7,5.825) 37(1.8,5.825) 38(0.9,5.825) 39(0,5.825) 40(-0.9,5.825) 41(-1.8,5.825) 42(-2.7,5.825) 43(-3.6,5.825) 44(-4.5,5.825)
MOLEX_47151-1051
  rect 0.3x2.6 smd: 1(4.5,3.74) 2(4,3.74) 3(3.5,3.74) 4(3,3.74) 5(2.5,3.74) 6(2,3.74) 7(1.5,3.74) 8(1,3.74) 9(0.5,3.74) 10(0,3.74) 11(-0.5,3.74) 12(-1,3.74) 13(-1.5,3.74) 14(-2,3.74) 15(-2.5,3.74) 16(-3,3.74) 17(-3.5,3.74) 18(-4,3.74) 19(-4.5,3.74)
  oval 1.5x3.3 hole 0.9x2.7: 20(7.25,2.98) 22(-7.25,2.98)
  oval 1.5x2.3 hole 0.9x1.7: 21(7.25,-2.98) 23(-7.25,-2.98)
MOLEX_54548-2271
  rect 1.65x1.3 smd: (-7.525,-1.9) (7.525,-1.9)
  rect 0.3x1 smd: 1(5.25,0) 2(4.75,0) 3(4.25,0) 4(3.75,0) 5(3.25,0) 6(2.75,0) 7(2.25,0) 8(1.75,0) 9(1.25,0) 10(0.75,0) 11(0.25,0) 12(-0.25,0) 13(-0.75,0) 14(-1.25,0) 15(-1.75,0) 16(-2.25,0) 17(-2.75,0) 18(-3.25,0) 19(-3.75,0) 20(-4.25,0) 21(-4.75,0) 22(-5.25,0)
MOLEX_1040310811
  rect 0.85x1.1 smd: 1(3.105,-4.95) 2(2.005,-4.95) 3(0.905,-4.95) 4(-0.195,-4.95) 5(-1.295,-4.95) 6(-2.395,-4.95) 7(-3.495,-4.95)
  rect 0.75x1.1 smd: 8(-4.545,-4.95)
  rect 1.2x1 smd: 9(5.74,1.2) 10(5.74,4.9)
  rect 1.17x1.8 smd: 11(-5.755,-4.6)
  rect 1.55x1.35 smd: 12(5.565,-4.825)
  rect 1.9x1.35 smd: 13(2.24,5.85) 14(-3.73,5.85)
ONSEMI_ESD5384
  round 0.235 smd: A1(-0.4,0.4) A2(0,0.4) A3(0.4,0.4) B1(-0.4,0) B2(0,0) B3(0.4,0) C1(-0.4,-0.4) C2(0,-0.4) C3(0.4,-0.4)
PP_SMT_R2MM
  round 2 smd: 1(0,0)
QFN24_05MM_0404MML
  rect 0.8x0.35 smd: 1(-2,1.25) 2(-2,0.75) 3(-2,0.25) 4(-2,-0.25) 5(-2,-0.75) 6(-2,-1.25) 13(2,-1.25) 14(2,-0.75) 15(2,-0.25) 16(2,0.25) 17(2,0.75) 18(2,1.25)
  rect 0.35x0.85 smd: 7(-1.25,-1.975) 8(-0.75,-1.975) 9(-0.25,-1.975) 10(0.25,-1.975) 11(0.75,-1.975) 12(1.25,-1.975) 19(1.25,1.975) 20(0.75,1.975) 21(0.25,1.975) 22(-0.25,1.975) 23(-0.75,1.975) 24(-1.25,1.975)
  rect 2.7x2.6 smd: 25(0,0)
QFN-30
  custom 0.8x0.7 smd: 1(-1.9,1.4) 8(-1.9,-1.4) 15(1.9,-1.4) 22(1.9,1.4)
  rect 0.8x0.2 smd: 2(-1.9,1) 3(-1.9,0.6) 4(-1.9,0.2) 5(-1.9,-0.2) 6(-1.9,-0.6) 7(-1.9,-1) 16(1.9,-1) 17(1.9,-0.6) 18(1.9,-0.2) 19(1.9,0.2) 20(1.9,0.6) 21(1.9,1)
  rect 0.2x0.8 smd: 9(-1,-1.9) 10(-0.6,-1.9) 11(-0.2,-1.9) 12(0.2,-1.9) 13(0.6,-1.9) 14(1,-1.9) 23(1,1.9) 24(0.6,1.9) 25(0.2,1.9) 26(-0.2,1.9) 27(-0.6,1.9) 28(-1,1.9)
  rect 1.8x0.3 smd: 29(0,0.6) 30(0,0)
R0402
  rect 0.508x0.508 smd: 1(-0.41,0) 2(0.41,0)
R0603
  rect 0.762x0.813 smd: 1(-0.76,0) 2(0.76,0)
SHC0402
  rect 1.5x2.5 smd: 1(-1.95,0) 2(1.95,0)
SL0603
  rect 0.762x0.813 smd: 1(-0.76,0) 2(0.76,0)
SO8
  oval 0.59x1.9 smd: 1(-1.905,-2.5) 2(-0.635,-2.5) 3(0.635,-2.5) 4(1.905,-2.5) 5(1.905,2.5) 6(0.635,2.5) 7(-0.635,2.5) 8(-1.905,2.5)
SOD323
  rect 1x0.6 smd: A(-1.14,0) C(1.14,0)
SOIC8_1D27MM
  oval 0.61x2.17 smd: 1(-1.905,-2.365) 2(-0.635,-2.365) 3(0.635,-2.365) 4(1.905,-2.365) 5(1.905,2.365) 6(0.635,2.365) 7(-0.635,2.365) 8(-1.905,2.365)
SOT23_5
  rect 0.61x1.397 smd: 1(-0.95,-1.3) 2(0,-1.3) 3(0.95,-1.3) 4(0.95,1.3) 5(-0.95,1.3)
SOT23_6B
  rect 0.61x1.397 smd: 1(-0.95,-1.3) 2(0,-1.3) 3(0.95,-1.3) 4(0.95,1.3) 5(0,1.3) 6(-0.95,1.3)
SOT50P160X90-3N
  rect 0.8x0.35 smd: 1(-0.8,0.5) 2(-0.8,-0.5) 3(0.8,0)
SWITCH-P
  round 1.75 hole 1.02: 1(-2.25,-1.25) 2(2.25,-1.25)
  round 2.5 hole 1.5: 3(-3.5,1.25) 4(3.5,1.25)
SWITCH-R
  rect 1.626x1.219 smd: 1(-3.8,0) 2(3.8,0)
TESTPOINT_39MIL
  round 1.016 smd: 1(0,0)
TSOP6
  oval 0.5x1.3 smd: 1(-0.95,-1.075) 2(0,-1.075) 3(0.95,-1.075) 4(0.95,1.075) 5(0,1.075) 6(-0.95,1.075)
TSSOP20_0D65MM
  oval 0.4x1.65 smd: 1(-2.925,-2.825) 2(-2.275,-2.825) 3(-1.625,-2.825) 4(-0.975,-2.825) 5(-0.325,-2.825) 6(0.325,-2.825) 7(0.975,-2.825) 8(1.625,-2.825) 9(2.275,-2.825) 10(2.925,-2.825) 11(2.925,2.825) 12(2.275,2.825) 13(1.625,2.825) 14(0.975,2.825) 15(0.325,2.825) 16(-0.325,2.825) 17(-0.975,2.825) 18(-1.625,2.825) 19(-2.275,2.825) 20(-2.925,2.825)
unnamed
  round 1.016 smd: (0,0)
unnamed#2
  round 0.5 hole 3.4 unplated: (0,0)
WURTH_61400416021
  round 1.5 hole 1: 1(0,3.5) 2(0,1) 3(0,-1) 4(0,-3.5)
  round 3.45 hole 2.3: 5(-2.71,6.57) 6(-2.71,-6.57)
XTAL-3225_25M
  rect 1.3x1.1 smd: 1(1.15,-0.95) 2(-1.15,-0.95) 3(-1.15,0.95) 4(1.15,0.95)
XTAL-3225_32K
  rect 1.4x1.2 smd: 1(-1.1,-0.85) 2(1.1,-0.85) 3(1.1,0.85) 4(-1.1,0.85)

## Nets
1V8: C12.1 C22.1 FB5.1 L2.2 PP6.1 R10.1 R23.1 R32.2 R33.2
3V3: C4.1 C11.1 C21.1 C80.1 FB4.1 J17.6 L1.2 PP2.1 R3.1 R22.1 R114.2 R115.2 R117.1 R118.1 U2.1 U2.3
5V: C2.1 C8.1 C372.1 C375.1 C376.1 D17.A F1.2(P2) PP3.1 R347.2(B) R3048.2(B) U1.1(VIN2) U58.4 U58.19(VIN3) U58.30
GND: C1.2 C2.2 C3.2 C4.2 C5.2 C6.2 C7.2 C8.2 C10.2 C11.2 C12.2 C13.2 C14.2 C20.2 C23.2 C24.2 C68.2 C69.2 C73.2 C74.2 C76.2 C78.2 C80.2 C81.2 C82.2 C83.2 C84.2 C85.1 C86.2 C372.2 C373.2 C374.2 C375.2 C376.2 C377.1 C378.2 C379.2 C380.2 C381.2 C382.2 C383.2 C384.2 C385.2 C386.1 C1645.2 C1647.2 C1648.2 C1649.2 C2473.1 C2474.2 C2475.2 C2476.2 C2477.2 C2478.2 C2479.2 C2480.2 C2481.2 C2482.2 D1.1(CATHODE) D11.A D12.A D13.A D14.A J1.1 J1.7 J1.8 J1.13 J1.14 J1.19 J1.20 J1.25 J1.26 J1.31 J1.32 J1.37 J1.38 J1.43 J1.44 J1.49 J1.50 J1.55 J1.56 J1.61 J1.62 J1.67 J1.68 J1.73 J1.74 J1.79 J1.80 J1.85 J1.86 J1.91 J1.92 J1.97 J1.98 J1.103 J1.104 J1.109 J1.110 J1.115 J1.116 J1.121 J1.122 J1.127 J1.133 J1.134 J1.139 J1.140 J1.145 J1.146 J1.151 J1.152 J1.157 J1.163 J1.164 J1.169 J1.170 J1.181 J1.182 J1.187 J1.188 J1.195 J1.196 J2.5 J2.6 J2.7 J2.8 J2.9(SH4) J7.4 J11.1 J11.4 J11.7 J11.10 J11.13 J11.16 J11.19 J13.2 J13.5 J13.8 J13.11 J13.17 J13.20 J13.21 J13.22 J13.23(SH4) J14.4 J14.5 J14.6(P6) J16.6(VSS) J16.11 J16.12 J16.13 J16.14 J17.3 J17.7 J17.8(G2) J18.4 J20.6 J21.4 J21.7 J21.10 J21.13 J21.16 J21.19 J21.22 J21.23 J21.G1 J21.G2 L527.2 PP5.1 PP8.1 PP18.1 PP19.1 Q2.2(S) Q4.2(S) Q5.2(S) Q6.2(S) R12.1 R24.2 R25.2 R26.2 R27.2 R28.2 R29.2 R87.1 R90.2(B) R91.2(B) R112.1 R348.1 R351.1 R355.1 R357.1 R358.1 R361.1 R366.1 R368.1 R371.1 R373.1 R3039.2 R3044.2 R3047.1 R3051.1 R3053.2 R3056.2(B) R3059.1 R3061.1 R3062.1 R3063.2(B) SW1.1 SW2.1 SW2.3 SW2.4(G2) SW16.2 SW16.3 SW16.4 U1.3 U1.9 U1.13 U2.2 U4.B2 U4.C2 U5.2 U6.4 U12.7 U18.15(VSS) U57.18 U57.25 U58.15 U58.27 U58.28 U59.1 U59.3 U59.20 U59.31 U59.33 U59.36 U60.2 U61.4 U61.5 U61.6 U61.7 Y2.2 Y2.4 Y9.2
VBAT: C381.1 C382.1 D18.A J18.1 R362.2(B) R363.2(B) R364.2(B) R365.2(B) R3052.2(B) U58.17
VBAT_AD: R3052.1 R3053.1 U18.14
VBUS: C7.1 C68.1 C69.1 C85.2 C378.1 C379.1 C380.1 FB2.1 FB3.1 L5.1 Q3.1 R2.1 R124.1 R360.1 R3058.2 TP30.1(PIN1) U1.6 U1.7 U4.A1 U4.C1 U6.1(VIN) U58.3 U58.20 U58.29
VBUSA: J14.1 U5.5(PW)
VDD_AMP: C20.1 FB2.2 U12.6
VDD_CORE: J1.179 PP22.1
VDDA: C2474.1 C2479.1 FB7.2 U18.5
AMP_SHUTDOWN: J1.81 Q6.1 R3061.2
AUDIO_L: J1.70 R127.1
AUDIO_R: J1.72 R128.1
BL_EN: J1.45 R88.2(B)
BOOST_EN: R3046.1 U18.11 U58.24
BT_H_WAKE: J1.36 U59.7
BT_WAKE: J1.34 U59.6
CAM1_CN: J1.149 J11.8
CAM1_CP: J1.147 J11.9(P9)
CAM1_DN0: J1.161 J11.2
CAM1_DN1: J1.155 J11.5
CAM1_DN2: J1.143 J11.11
CAM1_DN3: J1.137 J11.14
CAM1_DP0: J1.159 J11.3
CAM1_DP1: J1.153 J11.6
CAM1_DP2: J1.141 J11.12
CAM1_DP3: J1.135 J11.15
CAM1_IO0: J1.17 J11.17
CAM1_IO1: J1.15 J11.18
CEC: J13.13 Q3.3 U4.A2
CHARGE_EN: R3045.1 U18.12 U58.25
CM_1V8: C10.1 FB5.2 J1.183 J1.184 J1.185 J1.186 J21.3 R18.1
CM_3V3: C3.1 C24.1 C385.1 C1648.1 C1649.1 C2482.1 FB4.2 FB8.2 J1.191 J1.192 J1.193 J1.194 J11.22 J16.4 J20.5 J21.1 J21.2 R7.2 R8.2 R9.1 R15.2 R16.1 R17.1 R30.1 R31.2 R74.1 R370.1 R2436.1 R3032.2 R3057.1 U57.13 U59.9 U59.22 U61.8(VCC)
CM_VBAT: C1.1 FB3.2 J1.197 J1.198 J1.199 J1.200
CM_VDAC: FB6.2 J1.189 J1.190
CTS1: J1.57 R3036.2
DAC_2V5: C5.1 FB6.1 PP4.1 R110.1 U2.5(OUT)
DSI1_CN: J1.102 J21.14
DSI1_CP: J1.100 J21.15
DSI1_DN0: J1.96 J21.11
DSI1_DN1: J1.120 J21.17
DSI1_DN2: J1.114 J21.20
DSI1_DN3: J1.108 J21.8
DSI1_DP0: J1.94 J21.12
DSI1_DP1: J1.118 J21.18
DSI1_DP2: J1.112 J21.21
DSI1_DP3: J1.106 J21.9
EMMC_DISABLE_N: J1.2 R30.2
EMMC_EN_N_1V8: J1.90 Q2.1 R10.2
GPIO0-27_VREF: C13.1 J1.39 J1.40 R7.1 R32.1
GPIO7: J1.23 J20.1
GPIO8: J1.27 J20.2
GPIO9: J1.29 J20.3
GPIO10: J1.33 J20.4
GPIO11: J1.35 PP25.1
GPIO28: J1.28 R27.1
GPIO28-45_VREF: C14.1 J1.41 J1.42 R8.1 R33.1
GPIO29: J1.30 R26.1
GPIO44: J1.82 R29.1
GPIO45: J1.84 R28.1
GYRO_INT: J1.89 U57.12
HDMI_CEC: J1.171 Q3.2(S) R15.1
HDMI_CK_N: J1.111 J13.12
HDMI_CK_P: J1.113 J13.10
HDMI_D0_N: J1.117 J13.9
HDMI_D0_P: J1.119 J13.7
HDMI_D1_N: J1.123 J13.6
HDMI_D1_P: J1.125 J13.4
HDMI_D2_N: J1.129 J13.3
HDMI_D2_P: J1.131 J13.1
HDMI_HPD: J13.19 Q4.1 R3062.2 U4.C3
HDMI_HPD_N_1V8: J1.88 Q4.3 R18.2
HDMI_SCL: J1.175 J13.15 U4.A3
HDMI_SDA: J1.173 J13.16 U4.B3(SDA)
IN2SYS_EN: R3047.2(B) R3048.1 U18.13 U58.7
LCD_RST: J1.21 J21.5 R3057.2(B)
MCU_3V3: C2477.1 C2478.1 C2481.1 FB7.1 J7.1 PP23.1 R272.2 R3040.2 R3043.1 R3049.1 R3054.2 R3060.1 U18.16 U60.5(OUT)
MCU_IND: Q5.1 R3059.2 U18.9
MCU_REV1: J1.75 U18.6
MCU_REV2: J1.77 U18.7
MCU_REV3: J1.47 U18.8
MCU_RST: R272.1 SW1.2 U18.4
OSC_IN: C2475.1 U18.2 Y2.3
OSC_OUT: C2476.1 U18.3 Y2.1
PCM_CLK: J1.63 U59.26
PCM_DIN: J1.71 R3034.1
PCM_DOUT: J1.69 R3033.1
PCM_FS: J1.65 U59.28
RTC_CLK_32K768: R2437.1 U59.24
RTS1: J1.59 R3035.2
RXD0: J1.46 R3042.1
RXD1: J1.51 R3037.2
SCL0: J1.5 R43.2(B)
SCL1: J1.11 J11.20 R16.2 U57.23 U61.2
SD1_CLK: J1.52 U59.17
SD1_CMD: J1.54 U59.16
SD1_D0: J1.58 U59.18
SD1_D1: J1.60 U59.19
SD1_D2: J1.64 U59.14
SD1_D3: J1.66 U59.15
SDA0: J1.3 R42.2(B)
SDA1: J1.9 J11.21 R17.2 U57.24 U61.1
SDX_CLK: J1.10 J16.5 PP15.1
SDX_CMD: J1.12 J16.3 PP14.1
SDX_D0: J1.16 J16.7 PP16.1
SDX_D1: J1.18 J16.8 PP17.1
SDX_D2: J1.22 J16.1 PP12.1
SDX_D3: J1.24 J16.2 PP13.1
SDX_VREF: C23.1 J1.4 J1.6 R31.1
SWCLK: J7.3 R3044.1 U18.20
SWDIO: J7.2 R3043.2 U18.19
SWITCH: R3054.1 SW2.2 U18.10
TOUCH_INT_B: J1.78 R120.2(B)
TP_RST: J1.76 R121.2(B)
TVDAC: J1.166 PP20.1
TXD0: J1.48 R3041.1
TXD1: J1.53 R3038.2
USB_DM: J1.167 R122.1 U5.6
USB_DP: J1.165 R123.1 U5.1
USB_OTGID: J1.168 PP21.1 R12.2
VLED+: C76.1 C78.1 D10.C J21.29 J21.30 J21.31 TP33.1(PIN1)
VLED-: J21.25 J21.26 J21.27 R89.1 R90.1 R91.1 R3063.1 TP35.1(PIN1)
WL_DS: J1.83 R2436.2(B) U59.12
WL_H_WAKE: J1.87 U59.13(WL_H_WAKE)
N1195355: D2.2 PP9.1 R9.2
N1202496: C6.1 R2.2 U1.12
N1202592: L1.1 U1.8
N1202604: L2.1 U1.2
N1202780: F1.1 J2.1 PP1.1
N1203318: D1.2 PP7.1 R3.2
N1253376: D2.1(CATHODE) Q2.3
N1313759: C21.2 R22.2 R25.1 U1.4
N1313939: C22.2 R23.2 R24.1 U1.10
N1460421: R110.2 R112.2 U2.4
N1462486: C73.1 R87.2(B) R88.1 TP31.1(PIN1) U6.2
N1462534: C74.1 U6.5
N1462730: D10.A L5.2 TP32.1(PIN1) U6.3
N1462862: R89.2(B) TP34.1(PIN1) U6.6
N1475858: J14.3 R123.2(B) U5.3
N1475995: J14.2 R122.2(B) U5.4
N1478129: C84.1 D11.C J17.2 R42.1 R114.1
N1478137: C83.1 D12.C J17.1 R43.1 R115.1
N1478281: C81.1 D14.C J17.4 R117.2 R121.1 TP28.1(PIN1)
N1478289: C82.1 D13.C J17.5 R118.2 R120.1 TP29.1(PIN1)
N12332208: J9.2 R125.1 U12.5
N12332215: J9.1 U12.8(VO2)
N12333733: Q6.3 R124.2 U12.1
N12334307: C86.1 U12.2 U12.3
N12334479: R125.2 R126.1 U12.4
N12334672: C87.2 R126.2
N12335205: C87.1 R127.2(B) R128.2(B)
N12348524: R347.1 R348.2(B) U58.9
N12349119: C373.1 R354.1 R3045.2 R3046.2 U58.5
N12349661: R351.2(B) U58.26
N12350382: R354.2(B) R355.2(B) U58.16
N12351787: R3055.2(B) U58.6
N12351807: R357.2(B) U58.13
N12352049: R358.2(B) U58.14
N12352716: C374.1 U58.8
N12353932: R359.2(B) U58.1
N12353961: C377.2 R359.1
N12354896: R360.2(B) R361.2(B) U58.11
N12356531: L6.1 U58.2 U58.21
N12356557: L6.2 R362.1 U58.18
N12357486: D15.2 R363.1
N12357490: D15.1(CATHODE) U58.22
N12357528: D16.2 R364.1
N12357532: D16.1(CATHODE) U58.23
N12357554: R365.1 U58.10
N12360892: R366.2(B) R367.2(B) U58.12
N12361278: J18.2 R367.1
N12373140: R368.2(B) U57.1
N12374321: C383.1 R370.2(B) U57.8(VLOGIC)
N12375648: C384.1 U57.10
N12375668: R371.2(B) U57.11
N12378079: C386.2 U57.20
N12382248: C1647.1 R2435.2 SW16.1
N12382260: C1646.1 L527.1 R2435.1
N12388673: C1645.1 C2473.2 FB8.1 Y9.4(VCC)
N12388737: R3032.1 Y9.1
N12388773: R2437.2 Y9.3
N12389362: R3033.2 U59.25
N12389436: R3034.2 U59.27
N12392875: R3035.1 R3036.1 U59.44
N12392882: R3037.1 U59.43
N12392891: R3038.1 U59.42
N12396095: R3039.1 R3040.1 U18.1
N12403489: R3042.2 U18.18
N12403491: R3041.2 U18.17
N12412618: C2480.1 D17.C D18.C U60.1 U60.3
N12412734: R3049.2 R3051.2 U60.4
N12455651: J13.18 R3058.1
N12458967: R74.2 U61.3
N12474703: R3055.1 R3056.1
N12499716: D19.1(CATHODE) Q5.3
N12515410: J1.177 PP24.1
N123465088: R373.2(B) U57.9
N123664261: C1646.2 U59.2
N124996560: D19.2 R3060.2

Pads without a net: J1 93 95 99 101 105 107 124 126 128 130 132 136 138 142 144 148 150 154 156 158 160 162 172 174 176 178 180; J2 2 3 4; J13 14; J16 9 10; J18 3; J21 6 24 28; U1 5 11; U4 B1; U57 2 3 4 5 6 7 14 15 16 17 19 21 22; U59 4 5 8 10 11 21 23 29 30 32 34 35 37 38 39 40 41

## Via types
v1: diameter 0.508, hole 0.254, TOP to BOTTOM, 1082 vias

## Routing (per net, layer and track width the routed paths; a pad name or vN(x,y) marks a point on that pad's centre or on a via; arc(x,y) is an arc through that point)
1V8: length 52.1
  TOP w0.254: R10.1 41.09,58.45 37.62,58.45 v1(36.96,57.78) ; v1(37.85,47.62) v1(35.05,44.83) ; C22.1 R23.1 21.9,46.94 21.21,47.62 14.73,47.62 13.35,49.01 v1(12.97,49.01)
  TOP w0.381: R32.2 v1(44.2,77.09) ; R33.2 v1(44.2,76.33)
  BOTTOM w0.254: v1(37.85,47.62) 36.96,48.51 v1(36.96,57.78) ; v1(5.71,42.8) 6.76,42.8 v1(12.97,49.01)
  BOTTOM w0.508: v1(37.08,82.3) 39.24,82.3 44.2,77.34 v1(44.2,77.09) v1(44.2,76.33)
  vias: v1(4.95,45.72) v1(4.95,42.8) v1(5.71,45.72) v1(5.71,44.83) v1(5.7,43.83) v1(21.72,66.04) v1(22.48,66.04) v1(41.81,33.63) v1(41.78,32.89) v1(41.78,32.16) v1(42.6,33.66)
3V3: length 17.4
  TOP w0.254: R118.1 v1(84.07,52.96) ; R117.1 v1(84.07,57.66) ; R114.2 v1(84.07,62.23) ; R115.2 v1(88.77,64.14) ; R22.1 C21.1 13.46,35.26 14.68,34.04 19.94,34.04 21.34,35.43 22.56,35.43 22.95,35.81 C11.1
  vias: v1(23.11,34.8) v1(23.11,34.04) v1(23.88,34.8) v1(23.88,34.04) v1(24.64,34.8) v1(24.64,34.04) v1(40.77,26.29) v1(40.77,25.4) v1(41.66,26.29) v1(41.66,25.4) v1(50.29,25.27) v1(50.29,24.59) v1(51.05,25.27) v1(51.05,24.59) v1(62.1,42.55) v1(62.1,41.53) v1(63.25,42.55) v1(63.25,41.53) v1(75.06,42.67) v1(75.06,41.53) v1(75.95,42.67) v1(75.95,41.53) v1(90.42,50.04) v1(90.42,49.28) v1(90.42,48.51) v1(91.19,50.04) v1(91.19,49.28) v1(91.19,48.51)
5V: length 14.7
  TOP w0.254: R3048.2 v1(71.5,3.3) ; R347.2 v1(74.65,5.77)
  BOTTOM w0.254: v1(74.65,5.77) 72.18,3.3 v1(71.5,3.3) 67.06,7.75 v1(67.06,10.54)
  vias: v1(11.75,46.16) v1(11.76,45.31) v1(11.76,44.49) v1(12.58,46.16) v1(12.61,45.34) v1(12.61,44.51) v1(19.94,58.8) v1(20.07,58.04) v1(20.83,58.04) v1(21.59,58.04) v1(46.99,22.35) v1(46.99,21.59) v1(46.99,20.83) v1(47.37,8.64) v1(47.37,7.87) v1(47.75,22.35) v1(47.75,21.59) v1(47.75,20.83) v1(48.13,8.64) v1(48.13,7.87) v1(48.9,8.64) v1(48.9,7.87) v1(63.75,9.78) v1(63.75,9.02) v1(63.75,8.26) v1(64.52,9.78) v1(64.52,9.02) v1(64.52,8.26)
GND: length 736.4
  TOP w0.203: v1(29.91,43.98) v1(29.02,43.09) ; v1(5.21,70.61) U4.C2 U4.B2
  TOP w0.254: v1(15.97,40.27) 16.18,40.06 U1.9 ; C11.2 19.56,38.07 v1(19.56,38.28) ; C11.2 21.31,37.04 v1(21.31,37.62) ; C11.2 20.62,36.36 v1(20.62,35.61) ; J11.16 v1(33.95,6.16) ; Q4.2 3.44,70.6 v1(3.05,70.99) ; R3039.2 v1(43.4,70.51) ; v1(46.74,30.35) 47.13,30.75 J1.187 ; C80.2 v1(88.39,51.31) ; J1.85 v1(46.74,61.35) ; C2476.2 v1(37.56,74.52) 37.02,74.52 36.76,74.77 v1(36.76,75.63) ; J1.7 v1(46.74,88.35) ; v1(17.4,72.52) 18.05,71.87 C2473.1 v1(18.05,70.63) ; J21.19 v1(99.05,31.1) ; U61.4 v1(30.86,26.16) ; v1(94.11,29.72) 94.11,29.79 94.52,30.2 J21.22 ; R29.2 v1(61.09,62.48) ; J1.25 v1(46.74,82.95) ; J1.26 v1(58.06,82.65) ; C6.2 v1(19.59,44.37) ; J1.32 v1(58.06,80.85) ; v1(36.76,75.63) Y2.4 ; v1(36.76,75.63) 36.76,78.35 37.02,78.61 v1(40.27,78.61) ; J1.122 v1(58.06,50.25) ; R3044.2 v1(49.4,99.95) ; v1(76.33,103.63) 76.1,103.41 R87.1 ; J1.61 v1(46.74,68.55) ; J1.164 v1(58.06,37.65) ; J1.13 v1(46.74,86.55) ; v1(54.74,18.03) U2.2 v1(52.32,18.03) ; v1(51.56,18.03) 51.34,18.26 C4.2 ; U59.20 v1(21.97,80.74) ; J21.G1 v1(99.01,26.8) ; J1.92 v1(58.06,59.25) ; J1.188 58.2,30.45 v1(58.29,30.35) ; R28.2 v1(61.09,61.21) ; J1.20 v1(58.06,84.45) ; J1.14 v1(58.06,86.25) ; C2475.2 v1(40.67,74.55) 41.02,74.55 41.27,74.8 41.27,78.35 41.02,78.61 v1(40.27,78.61) ; J1.8 v1(58.06,88.05) ; v1(35.81,75.44) 36.07,75.18 C2474.2 ; v1(87.88,55.5) 88.14,55.5 88.65,54.98 D13.A ; J1.19 v1(46.74,84.75) ; J11.4 v1(39.95,6.16) ; J21.13 v1(99.05,32.9) ; v1(5.59,68.71) 5.84,68.71 6.13,68.42 R3062.1 ; J21.10 94.33,33.8 v1(94.27,33.74) ; C373.2 v1(74.39,19.84) ; R25.2 v1(9.21,38.35) ; v1(98.78,37.39) 98.6,37.2 J21.G2 ; J1.196 54.77,28.05 v1(54.71,27.99) ; J1.110 v1(58.06,53.85) ; U61.5 v1(30.86,34.16) ; v1(28.32,90.55) 28.7,90.17 U59.3 ; J11.19 v1(32.44,6.16) ; J11.13 v1(35.44,6.16) ; v1(40.27,78.61) Y2.2 ; R12.1 v1(60.96,36.45) ; J1.56 v1(58.06,70.05) ; J1.116 v1(58.06,52.05) ; J11.1 v1(41.44,6.16) ; J1.44 v1(58.06,73.65) ; J1.181 49.59,32.55 v1(49.89,32.84) ; J21.23 v1(99.05,29.9) ; U18.15 37.38,64.05 v1(36.96,63.63) ; v1(15.08,40.27) 14.84,40.51 U1.3 ; J1.127 v1(46.74,48.75) ; Q2.2 v1(44.7,56.4) ; R351.1 v1(73.79,18.54) ; J1.80 v1(58.06,62.85) ; D11.A 88.77,58.79 v1(87.88,57.91) ; v1(33.53,43.69) 33.43,43.59 C385.2 ; J1.170 v1(58.06,35.85) ; J1.49 v1(46.74,72.15) ; L527.2 v1(31.11,93.73) ; U59.36 v1(30.61,80.74) ; J1.134 v1(58.06,46.65) ; J1.1 v1(46.74,90.15) ; J1.109 v1(46.74,54.15) 46.61,54.28 45.39,54.28 42.52,57.15 20.07,57.15 19.05,58.17 19.05,69.24 C1645.2 v1(18.8,69.72) ; v1(50.04,28.07) 49.75,28.35 J1.195 ; C84.2 v1(84.07,60.71) ; J1.163 v1(46.74,37.95) ; J1.38 v1(58.06,79.05) ; J1.151 v1(46.74,41.55) ; U57.18 v1(31.88,44.34) ; J1.31 v1(46.74,81.15) ; J1.79 v1(46.74,63.15) ; J1.140 v1(58.06,44.85) ; R112.1 v1(59.47,15.88) ; v1(92.33,32.33) 92.33,31.62 R3063.2 93.22,31.75 v1(93.22,32.33) ; D12.A v1(87.88,60.7) ; C24.2 v1(27.05,6.6) ; J21.4 94.49,35.6 94.23,35.35 v1(94.23,35.13) ; C2480.2 v1(26.8,60.96) ; J1.152 v1(58.06,41.25) ; C384.2 v1(30.15,37.59) ; J1.169 v1(46.74,36.15) ; U61.6 v1(29.59,34.16) ; J1.115 v1(46.74,52.35) ; Q6.2 v1(57.78,13.98) ; v1(33.66,60.96) C2481.2 v1(34.54,60.07) ; J11.10 v1(36.95,6.16) ; R3051.1 v1(30.73,58.42) ; J1.121 v1(46.74,50.55) ; J21.7 v1(99.05,34.7) ; C1649.2 v1(22.45,92.17) ; v1(37.08,60.96) C2478.2 36.2,60.2 v1(36.32,60.07) ; C83.2 v1(88.39,62.61) ; C383.2 v1(27.5,37.59) ; Q5.2 v1(32.38,72.64) ; U61.7 v1(28.32,34.16) ; J1.139 v1(46.74,45.15) ; J1.145 v1(46.74,43.35) ; J1.55 v1(46.74,70.35) ; R3053.2 v1(33.3,67.03) ; J1.68 v1(58.06,66.45) ; v1(54.99,32.64) 55.38,32.25 J1.182 ; J1.86 v1(58.06,61.05) ; C377.1 v1(70.39,16.86) ; J1.73 v1(46.74,64.95) ; J1.43 v1(46.74,73.95) ; J1.91 v1(46.74,59.55) ; J1.74 v1(58.06,64.65) ; J1.98 v1(58.06,57.45) ; U59.33 v1(30.5,78.87) ; J1.97 v1(46.74,57.75) ; C81.2 v1(84.07,56.13) ; v1(30.86,90.55) 30.5,90.19 U59.1 ; J11.7 v1(38.44,6.16) ; J1.50 v1(58.06,71.85) ; J1.67 v1(46.74,66.75) ; C1647.2 v1(31.11,97.16) ; J1.37 v1(46.74,79.35) ; C73.2 v1(79.5,102.74) ; J1.104 v1(58.06,55.65) ; Y9.2 v1(24.09,73.53) ; D14.A v1(87.88,56.89) ; C82.2 v1(88.39,52.96) ; J1.62 v1(58.06,68.25) ; R373.1 v1(28.88,37.59) ; C23.2 v1(57.28,98.04) ; J1.146 v1(58.06,43.05) ; J1.133 v1(46.74,46.95) 46.72,46.96 44.73,46.96 39.12,52.58 17.78,52.58 13.67,56.69 13.67,65.58 11.73,67.51 v1(11.73,68.71) ; v1(94.23,32.33) 94.28,32.33 94.61,32 J21.16 ; J1.157 v1(46.74,39.75) ; C1648.2 v1(16.89,80.29) ; J1.103 v1(46.74,55.95) ; U59.31 v1(28.7,78.87) ; R371.1 v1(31.42,37.62) ; C2482.2 v1(30.73,35.31) ; C2477.2 v1(38.73,61.82) ; C2479.2 v1(34.67,75.44) ; R3059.1 v1(33.63,70.51)
  TOP w0.381: 16.87,43.21 C8.2 ; C8.2 17.61,43.94 ; C8.2 16.87,44.68 ; 22.64,31.94 D1.1 23.31,31.94 ; 75.67,19.84 C373.2 75.18,20.32 ; 74.96,103.41 R87.1 75.44,103.89 ; R358.1 83.34,7.98 ; R358.1 83.34,7.01 ; R358.1 83.82,7.49 ; 83.17,98.45 C74.2 83.91,99.19 ; 28.55,47.22 C386.1 28.06,46.74 ; 89.28,63.25 C83.2 89.28,61.98 ; 64.67,98.06 C69.2 ; C69.2 66.14,98.06 ; C69.2 65.41,97.32 ; C375.2 71.48,8.4 ; C375.2 70,8.4 ; C375.2 70.74,7.66 ; C76.2 89.03,94.79 ; C76.2 89.03,91.64 ; C76.2 88,93.22 ; C76.2 90.06,93.22 ; 36.83,61.26 C2478.2 36.83,60.37 ; 52.61,14.73 C86.2 ; C86.2 53.22,15.37 ; C86.2 53.22,14.1 ; 30.94,38.35 R371.1 31.9,38.35 ; 60.71,82.42 R27.2 60.23,81.94 ; 88.69,50.67 C80.2 89.28,50.67 ; 18.13,101.6 SW1.1 ; SW1.1 19.17,100.76 ; SW1.1 20.21,101.6 ; SW1.1 19.17,102.44 ; 27.94,7.24 C24.2 27.94,5.97 ; 78.48,102.11 C73.2 78.48,103.38 ; 29.59,35.94 C2482.2 29.59,34.67 ; R3047.1 73.66,3.18 ; R3047.1 73.03,2.57 ; R3047.1 72.39,3.18 ; 31.59,58.9 R3051.1 31.59,57.94 ; 72.77,7.66 C376.2 72.03,8.4 ; 85.09,55.5 C81.2 85.09,56.77 ; 54.38,20.95 C5.2 ; C5.2 54.99,20.32 ; C5.2 54.99,21.59 ; 88.9,60.17 D12.A ; D12.A 88.9,61.23 ; D12.A 89.63,60.7 ; 73.3,17.68 R351.1 74.27,17.68 ; PP19.1 v1(46.1,20.07) ; 27.37,101.35 SW16.2 ; SW16.2 28.12,100.02 ; SW16.2 28.12,102.67 ; 16.74,45.2 C2.2 ; C2.2 17.58,46.23 ; C2.2 15.9,46.23 ; 83.82,9.27 R355.1 83.34,8.79 ; D13.A 89.63,54.98 ; D13.A 88.9,54.46 ; D13.A 88.9,55.51 ; R357.1 83.82,6.22 ; R357.1 83.34,6.71 ; R357.1 83.34,5.74 ; 30.42,93.24 L527.2 30.42,94.21 ; 60.23,61.7 R28.2 60.23,60.73 ; 31.07,100.02 SW16.3 ; SW16.3 31.07,102.67 ; SW16.3 31.83,101.35 ; 56.36,14.25 R3061.1 ; R3061.1 56.36,15.21 ; R3061.1 55.88,14.73 ; C14.2 v1(45.47,76.33) ; 27.02,38.33 C383.2 27.99,38.33 ; 82.55,102.61 R91.2 ; R91.2 83.82,102.61 ; R91.2 83.19,103.22 ; 72.03,14.72 C378.2 ; C378.2 73.51,14.72 ; C378.2 72.77,15.45 ; R361.1 79.35,4.03 ; R361.1 78.87,3.55 ; R361.1 78.38,4.03 ; SW16.4 30.33,102.85 ; SW16.4 29.6,103.57 ; SW16.4 28.87,102.85 ; 81.41,3.55 R366.1 ; R366.1 80.92,4.03 ; R366.1 81.89,4.03 ; 88.69,53.59 C82.2 89.28,53.59 ; 85.09,60.07 C84.2 85.09,61.34 ; 22.45,90.83 C1649.2 21.97,91.31 ; 75.56,3.18 R348.1 ; R348.1 76.84,3.18 ; R348.1 76.2,2.57 ; 57.91,97.15 C23.2 56.64,97.15 ; 21.87,43.21 R24.2 ; R24.2 22.36,43.69 ; R24.2 21.87,44.17 ; R90.2 85.47,102.61 ; R90.2 84.84,103.22 ; R90.2 84.2,102.61 ; 29.36,38.33 R373.1 28.4,38.33 ; 66.8,98.68 C68.2 ; C68.2 68.07,98.68 ; C68.2 67.44,98.07 ; C78.2 88.6,90.04 ; C78.2 87.87,90.78 ; C78.2 87.87,89.31 ; 34.23,60.36 C2481.2 33.91,60.37 ; 70,14.72 C379.2 ; C379.2 71.48,14.72 ; C379.2 70.74,15.45 ; 60.23,80.54 R26.2 ; R26.2 60.23,81.51 ; R26.2 60.71,81.03 ; 74.19,4.03 C374.2 ; C374.2 74.68,3.55 ; C374.2 75.16,4.03 ; 30.63,38.33 C384.2 29.67,38.33 ; 15.51,37.44 C7.2 15.51,35.97 ; 59.47,17.37 R112.1 59.95,16.89 ; C85.1 62.1,97.93 ; C85.1 62.1,95.87 ; C85.1 60.53,96.9 ; C85.1 63.68,96.9 ; C13.2 v1(45.47,77.09) ; v1(55.88,5.08) U12.7 v1(55.88,8.51) ; R368.1 25.27,45.47 ; R368.1 25.76,44.99 ; R368.1 24.79,44.99 ; 32.64,44.07 C385.2 32.16,43.59 ; 48.67,99.47 R3044.2 48.67,100.43 ; 30.42,96.67 C1647.2 30.42,97.64 ; 18.39,80.29 C1648.2 17.91,80.78 ; 60.23,62 R29.2 60.23,62.97 ; 17.68,70.89 C2473.1 17.31,72.36 ; 10,38.84 R25.2 10,37.87
  TOP w0.508: v1(15.37,30.1) 14.99,29.72 ; 14.99,29.72 v1(14.61,30.1) ; 14.99,29.72 U5.2 ; D1.1 v1(25.02,32.64)
  TOP w0.635: SW2.1 3.83,89.39 ; SW2.1 2.73,88.29 ; SW2.1 3.83,87.18 ; SW2.1 4.94,88.29 ; 96.4,58.33 J17.8 ; J17.8 97.63,58.95 ; J17.8 96.4,59.58 ; J17.8 95.18,58.95 ; 5.2,55.32 J2.7 ; J2.7 4.05,56.07 ; J2.7 6.35,56.07 ; J2.7 5.2,56.83 ; 1.75,48.17 J2.8 ; J2.8 1.75,49.68 ; J2.8 2.9,48.92 ; C1.2 42.77,23.62 ; C1.2 41.93,24.65 ; C1.2 41.93,22.59 ; C1.2 41.1,23.62 ; 41.1,27.94 C3.2 ; C3.2 41.93,28.97 ; C3.2 42.77,27.94 ; 96.4,52.43 J17.7 ; J17.7 95.18,53.05 ; J17.7 97.63,53.05 ; J17.7 96.4,53.68 ; SW2.3 6.33,88.52 ; SW2.3 7.81,87.04 ; SW2.3 4.85,87.04 ; SW2.3 6.33,85.56 ; J13.21 4.53,79.15 ; J13.21 3.15,78.18 ; J13.21 3.15,80.13 ; J13.21 1.77,79.15 ; 90.81,14.65 C382.2 ; C382.2 91.54,15.38 ; C382.2 90.07,15.38 ; 41.93,29.58 C10.2 ; C10.2 41.1,30.61 ; C10.2 42.77,30.61 ; 5.2,48.17 J2.6 ; J2.6 5.2,49.68 ; J2.6 4.05,48.92 ; J2.6 6.35,48.92 ; 10.92,30.28 J14.4 ; J14.4 11.9,31.26 ; J14.4 10.92,32.24 ; J14.4 9.94,31.26 ; J7.4 51.31,103.72 ; J7.4 50.2,102.62 ; J7.4 51.31,101.51 ; J7.4 52.41,102.62 ; J13.23 3.15,65.63 ; J13.23 3.15,63.68 ; J13.23 1.77,64.66 ; 4.09,39.77 C12.2 ; C12.2 5.56,39.77 ; C12.2 4.83,39.03 ; 6.33,92.56 SW2.4 ; SW2.4 6.33,95.52 ; SW2.4 7.81,94.04 ; SW2.4 4.85,94.04 ; 96.23,11.88 J18.4 ; J18.4 98.44,11.88 ; J18.4 97.34,12.98 ; J18.4 97.34,10.77 ; 10.64,11.6 J20.6 ; J20.6 10.64,13.8 ; J20.6 9.53,12.7 ; J20.6 11.74,12.7 ; 8.21,32.38 J14.6 ; J14.6 10.17,34.33 ; J14.6 6.26,34.33 ; J14.6 8.21,36.28 ; 68.33,6.42 C372.2 ; C372.2 67.3,7.26 ; C372.2 69.35,7.26 ; C372.2 68.33,8.1 ; J14.5 10.17,21.19 ; J14.5 8.21,23.14 ; J14.5 6.26,21.19 ; J14.5 8.21,19.24 ; J2.9 1.75,56.83 ; J2.9 1.75,55.32 ; J2.9 2.9,56.07 ; 60.58,4.65 C20.2 ; C20.2 59.55,5.48 ; C20.2 60.58,6.32 ; C20.2 61.61,5.48 ; 9.11,78.18 J13.20 ; J13.20 7.23,79.15 ; J13.20 9.11,80.13 ; J13.20 10.99,79.15 ; C380.2 68.33,16.69 ; C380.2 69.35,15.85 ; C380.2 68.33,15.01 ; C380.2 67.3,15.85 ; 92.84,14.65 C381.2 ; C381.2 93.57,15.38 ; C381.2 92.1,15.38
  GND02 w0.635: J2.6 6.3,49.63 ; J2.6 6.3,48.22 ; J2.6 4.1,48.22 ; J2.6 4.1,49.63 ; J18.4 98.13,11.08 ; J18.4 98.13,12.67 ; J18.4 96.54,11.08 ; J18.4 96.54,12.67 ; 4.1,55.37 J2.7 ; J2.7 6.3,55.37 ; J2.7 4.1,56.78 ; J2.7 6.3,56.78 ; 1.82,63.73 J13.23 ; J13.23 4.48,65.58 ; J13.23 1.82,65.58 ; J13.23 4.48,63.73 ; 6.82,32.93 J14.6 ; J14.6 6.82,35.73 ; J14.6 9.61,32.93 ; J14.6 9.61,35.73 ; 10.22,31.97 J14.4 ; J14.4 10.22,30.55 ; J14.4 11.63,30.55 ; J14.4 11.63,31.97 ; J14.5 9.61,19.79 ; J14.5 6.82,19.79 ; J14.5 9.61,22.59 ; J14.5 6.82,22.59 ; 2.85,49.63 J2.8 2.85,48.22 ; 50.51,103.41 J7.4 ; J7.4 52.1,101.82 ; J7.4 52.1,103.41 ; J7.4 50.51,101.82 ; J20.6 11.43,13.5 ; J20.6 9.84,13.5 ; J20.6 9.84,11.9 ; J20.6 11.43,11.9 ; J13.20 10.94,78.23 ; J13.20 10.94,80.08 ; J13.20 7.28,80.08 ; J13.20 7.28,78.23 ; 5.27,92.98 SW2.4 ; SW2.4 7.39,92.98 ; SW2.4 5.27,95.1 ; SW2.4 7.39,95.1 ; 7.28,63.73 J13.22 ; J13.22 10.94,65.58 ; J13.22 7.28,65.58 ; J13.22 10.94,63.73 ; SW2.3 7.39,88.1 ; SW2.3 7.39,85.98 ; SW2.3 5.27,85.98 ; SW2.3 5.27,88.1 ; 3.04,87.49 SW2.1 ; SW2.1 4.63,87.49 ; SW2.1 4.63,89.08 ; SW2.1 3.04,89.08 ; 2.85,55.37 J2.9 2.85,56.78 ; 1.82,80.08 J13.21 ; J13.21 1.82,78.23 ; J13.21 4.48,80.08 ; J13.21 4.48,78.23
  BOTTOM w0.254: J13.8 8.39,72.9 8.1,72.62 v1(8.1,72.44) ; J13.5 8.42,74.41 v1(8.08,74.75) ; J13.11 8.03,71.4 v1(7.75,71.12) ; J16.6 v1(32.66,0.91) ; v1(11.73,68.71) 11.73,68.66 11.48,68.4 J13.17 ; J13.2 v1(8.13,75.9)
  BOTTOM w0.508: J16.14 35.18,12.85 ; J16.14 34,11.95 ; J16.14 34,13.75 ; J16.14 32.82,12.85 ; J16.13 29.21,12.85 ; J16.13 28.03,13.75 ; J16.13 26.85,12.85 ; J16.13 28.03,11.95 ; 36.02,1.27 J16.11 36.84,2.4 ; J16.12 24.7,3.08 ; J16.12 23.7,2.18 ; J16.12 24.7,1.27 ; J16.12 25.71,2.18
  BOTTOM w0.635: J2.9 2.9,56.07 ; J2.9 1.75,56.83 ; J2.9 1.75,55.32 ; 1.75,48.17 J2.8 ; J2.8 1.75,49.68 ; J2.8 2.9,48.92 ; J13.23 4.53,64.66 ; J13.23 3.15,63.68 ; J13.23 3.15,65.63 ; J13.23 1.77,64.66 ; SW2.4 6.33,95.52 ; SW2.4 7.81,94.04 ; SW2.4 6.33,92.56 ; SW2.4 4.85,94.04 ; 10.64,11.6 J20.6 ; J20.6 11.74,12.7 ; J20.6 10.64,13.8 ; J20.6 9.53,12.7 ; J14.4 11.9,31.26 ; J14.4 10.92,32.24 ; J14.4 10.92,30.28 ; J14.4 9.94,31.26 ; J13.20 10.99,79.15 ; J13.20 9.11,80.13 ; J13.20 9.11,78.18 ; J13.22 9.11,65.63 ; J13.22 9.11,63.68 ; J13.22 7.23,64.66 ; J13.22 10.99,64.66 ; 6.33,85.56 SW2.3 ; SW2.3 6.33,88.52 ; SW2.3 7.81,87.04 ; SW2.3 4.85,87.04 ; J7.4 51.31,103.72 ; J7.4 50.2,102.62 ; J7.4 51.31,101.51 ; J7.4 52.41,102.62 ; SW2.1 4.94,88.29 ; SW2.1 2.73,88.29 ; SW2.1 3.83,89.39 ; SW2.1 3.83,87.18 ; J18.4 98.44,11.88 ; J18.4 97.34,10.77 ; J18.4 97.34,12.98 ; J18.4 96.23,11.88 ; J2.7 5.2,56.83 ; J2.7 6.35,56.07 ; J2.7 4.05,56.07 ; J2.7 5.2,55.32 ; J14.5 8.21,23.14 ; J14.5 6.26,21.19 ; J14.5 8.21,19.24 ; J14.5 10.17,21.19 ; J2.6 6.35,48.92 ; J2.6 4.05,48.92 ; J2.6 5.2,48.17 ; J14.6 10.17,34.33 ; J14.6 8.21,36.28 ; J14.6 8.21,32.38 ; J14.6 6.26,34.33 ; 3.15,78.18 J13.21 ; J13.21 3.15,80.13 ; J13.21 1.77,79.15
  vias: v1(1.02,71.88) v1(1.02,68.96) v1(1.14,97.79) v1(1.27,93.34) v1(1.27,65.79) v1(1.27,62.36) v1(1.4,76.07) v1(1.4,24.77) v1(1.52,81.92) v1(1.65,42.67) v1(1.65,38.23) v1(1.78,46.48) v1(1.91,90.04) v1(2.03,30.48) v1(2.16,18.54) v1(2.16,12.7) v1(2.54,85.22) v1(3.33,39.75) v1(3.43,95.76) v1(3.43,75.31) v1(3.43,35.18) v1(3.84,38.66) v1(3.94,61.21) v1(4.06,83.44) v1(4.7,8.89) v1(4.83,58.42) v1(4.83,22.48) v1(5.41,38.61) v1(5.84,31.88) v1(5.84,13.46) v1(6.35,27.56) v1(6.73,37.59) v1(7.24,91.82) v1(7.37,103.89) v1(7.37,57.4) v1(7.37,54.99) v1(7.49,98.3) v1(7.62,89.53) v1(8,17.27) v1(8.64,77.34) v1(8.64,25.27) v1(8.64,10.41) v1(9.27,101.85) v1(9.53,88.01) v1(9.53,81.53) v1(9.53,5.21) v1(10.03,91.82) v1(10.67,36.32) v1(10.79,99.57) v1(10.92,1.4) v1(11.18,103.89) v1(11.43,83.57) v1(11.43,77.34) v1(11.56,94.74) v1(11.56,39.37) v1(11.94,33.91) v1(12.06,49.02) v1(12.06,18.29) v1(12.45,78.61) v1(12.57,29.08) v1(12.57,26.67) v1(12.57,25.02) v1(12.57,21.97) v1(12.57,14.61) v1(12.83,81.92) v1(13.08,32) v1(13.72,77.34) v1(13.84,38.48) v1(14.61,92.58) v1(14.68,75.54) v1(15.11,84.96) v1(15.11,42.29) v1(15.08,41.16) v1(15.08,39.38) v1(15.24,103.63) v1(15.24,96.52) v1(15.37,80.52) v1(15.37,32.77) v1(15.49,38.48) v1(15.62,90.04) v1(15.6,74.02) v1(15.75,77.34) v1(16,42.29) v1(15.97,41.16) v1(15.97,39.38) v1(16,21.08) v1(16,14.35) v1(16.13,23.75) v1(16.13,17.4) v1(16.26,1.52) v1(16.38,75.44) v1(16.51,99.31) v1(16.51,72.9) v1(16.89,93.98) v1(16.87,85.5) v1(17.14,70.1) v1(17.4,14.35) v1(18.03,91.82) v1(18.03,69.34) v1(18.16,97.28) v1(18.29,77.22) v1(18.29,6.1) v1(18.41,84.96) v1(19.05,11.68) v1(19.18,103.63) v1(19.43,89.53) v1(19.43,14.73) v1(19.68,42.16) v1(19.81,67.31) v1(19.81,66.04) v1(19.94,99.82) v1(20.07,95.38) v1(20.7,92.58) v1(20.7,66.04) v1(20.7,20.19) v1(21.34,16.38) v1(21.34,1.52) v1(21.46,101.98) v1(21.84,76.33) v1(22.35,97.16) v1(22.48,27.05) v1(22.86,5.21) v1(23.11,44.2) v1(23.11,14.1) v1(23.37,45.72) v1(23.5,103.63) v1(23.5,99.44) v1(23.5,94.36) v1(23.5,47.5) v1(24.26,1.02) v1(24.38,50.04) v1(24.51,91.44) v1(24.51,45.47) v1(24.77,31.88) v1(24.77,29.59) v1(25.4,96.39) v1(25.4,93.09) v1(25.4,46.1) v1(25.4,42.55) v1(25.53,73.15) v1(25.53,16.51) v1(25.53,3.81) v1(25.65,101.6) v1(25.65,20.19) v1(25.91,40.39) v1(26.16,65.41) v1(26.16,33.78) v1(26.29,98.55) v1(26.42,91.31) v1(26.8,50.04) v1(26.92,14.35) v1(27.3,66.29) v1(27.3,11.68) v1(27.56,4.95) v1(27.81,103) v1(28.12,99.77) v1(28.13,43.98) v1(28.13,43.09) v1(28.13,42.2) v1(28.32,98.17) v1(28.32,96.65) v1(28.32,95) v1(28.32,93.6) v1(28.32,92.08) v1(28.32,20.19) v1(28.57,103) v1(28.83,45.97) v1(29.02,43.98) v1(29.02,42.2) v1(29.34,15.62) v1(29.91,43.09) v1(29.91,42.2) v1(30.61,61.85) v1(30.61,61.09) v1(30.61,46.35) v1(30.73,103) v1(30.73,59.44) v1(30.99,98.42) v1(30.99,92.2) v1(31.07,99.74) v1(31.11,95.5) v1(31.62,103) v1(31.75,36.45) v1(31.75,20.19) v1(31.88,31.11) v1(32.13,41.15) v1(32.13,39.88) v1(33.15,11.68) v1(33.4,90.3) v1(33.53,96.39) v1(33.66,99.31) v1(33.78,93.22) v1(34.16,103) v1(35.05,50.29) v1(35.56,79.5) v1(35.56,0.89) v1(35.81,77.09) v1(36.07,57.78) v1(36.83,80.77) v1(37.21,100.33) v1(37.34,97.03) v1(37.34,93.34) v1(37.34,89.66) v1(37.97,102.87) v1(37.97,1.65) v1(38.35,79.5) v1(38.73,34.54) v1(39.24,42.04) v1(39.37,80.64) v1(39.83,59.03) v1(39.75,46.99) v1(40.01,3.17) v1(40.26,90.17) v1(40.39,28.32) v1(40.39,27.56) v1(40.51,63.88) v1(40.51,30.35) v1(40.64,100.84) v1(40.64,12.19) v1(40.77,34.54) v1(40.77,24) v1(40.77,23.24) v1(40.89,31.24) v1(41.15,94.23) v1(41.4,97.66) v1(41.4,48.39) v1(41.78,1.4) v1(41.91,103.89) v1(42.65,57.73) v1(42.77,59) v1(42.8,46.99) v1(43.18,95.89) v1(43.43,5.21) v1(43.94,92.71) v1(44.07,87) v1(44.2,99.06) v1(44.2,84.33) v1(44.58,43.05) v1(44.7,6.35) v1(45.21,88.77) v1(45.47,59.56) v1(45.47,57.78) v1(45.47,52.32) v1(45.72,1.4) v1(45.85,95.89) v1(45.97,98.68) v1(46.86,3.05) v1(47.12,99.19) v1(48.39,97.92) v1(48.9,21.59) v1(49.53,91.82) v1(49.78,88.39) v1(49.78,65.02) v1(49.91,84.71) v1(50.04,61.85) v1(50.16,90.3) v1(50.29,77.09) v1(50.29,48.9) v1(50.29,1.27) v1(50.67,3.05) v1(50.8,93.09) v1(50.93,100.46) v1(50.93,83.19) v1(50.93,79.12) v1(51.05,88.27) v1(51.31,59.82) v1(51.31,51.44) v1(51.56,75.95) v1(51.82,66.55) v1(51.82,63.88) v1(51.82,37.97) v1(51.94,84.71) v1(51.94,46.74) v1(51.94,42.42) v1(52.07,61.85) v1(52.07,57.53) v1(52.07,49.91) v1(52.07,33.66) v1(52.07,15.62) v1(52.2,55.5) v1(52.2,1.27) v1(52.32,88.27) v1(52.58,95.89) v1(53.09,64.9) v1(53.34,104.01) v1(53.47,59.31) v1(53.59,61.09) v1(53.72,81.79) v1(53.85,101.73) v1(53.85,92.84) v1(53.85,84.58) v1(53.85,66.67) v1(53.85,25.53) v1(53.98,40.01) v1(54.1,72.39) v1(54.1,15.62) v1(54.23,35.43) v1(54.48,76.96) v1(54.61,58.29) v1(54.61,55.24) v1(54.74,81.79) v1(54.74,79.12) v1(54.74,63.12) v1(54.74,53.09) v1(54.74,48.26) v1(54.74,45.09) v1(54.86,65.91) v1(54.86,50.55) v1(54.86,19.94) v1(55.12,98.04) v1(55.12,71.88) v1(55.12,69.98) v1(55.24,91.06) v1(55.37,22.48) v1(56.39,15.62) v1(56.52,75.18) v1(56.64,101.73) v1(56.64,92.96) v1(57.02,103.76) v1(57.4,91.06) v1(57.66,18.03) v1(58.29,33.02) v1(58.29,5.08) v1(58.67,1.4) v1(58.8,76.2) v1(59.05,23.24) v1(59.18,95.25) v1(59.18,93.09) v1(59.31,97.16) v1(59.31,91.06) v1(59.31,48.01) v1(59.69,42.42) v1(59.69,4.06) v1(59.82,58.93) v1(60.33,44.7) v1(60.58,95.25) v1(60.58,64.64) v1(60.83,103.89) v1(60.83,34.54) v1(60.96,91.06) v1(61.21,92.84) v1(61.21,82.3) v1(61.34,4.06) v1(61.47,80.9) v1(61.47,57.28) v1(61.59,67.56) v1(61.85,71.63) v1(61.98,75.18) v1(62.1,95.25) v1(62.1,9.91) v1(62.1,8.51) v1(62.23,1.27) v1(62.48,47.37) v1(63.12,59.05) v1(63.25,44.32) v1(63.25,5.21) v1(63.5,62.48) v1(63.63,95.38) v1(63.88,64.64) v1(64.14,73.03) v1(64.14,69.22) v1(64.52,103.89) v1(65.15,3.81) v1(65.41,96.77) v1(65.53,6.99) v1(65.79,95) v1(65.91,1.27) v1(66.78,5.97) v1(67.06,102.62) v1(67.69,4.83) v1(67.69,2.79) v1(68.2,103.89) v1(68.33,92.2) v1(68.83,98.81) v1(69.34,17.4) v1(69.6,6.35) v1(69.6,2.92) v1(69.6,1.27) v1(69.72,87.88) v1(69.85,15.88) v1(70.1,102.74) v1(70.23,7.24) v1(70.74,6.35) v1(70.84,15.95) v1(71.25,7.24) v1(71.63,15.85) v1(71.88,19.56) v1(72.26,84.96) v1(72.26,7.24) v1(72.52,68.71) v1(72.77,90.68) v1(73.53,1.27) v1(73.79,21.59) v1(73.91,13.84) v1(74.17,73.28) v1(74.3,36.96) v1(74.3,34.67) v1(74.3,31.24) v1(74.3,28.57) v1(74.42,15.24) v1(75.18,69.98) v1(75.23,14.63) v1(75.44,60.71) v1(75.44,57.4) v1(75.44,54.74) v1(75.82,65.91) v1(75.82,14.1) v1(76.33,93.98) v1(76.33,81.28) v1(76.58,77.98) v1(76.96,1.27) v1(77.09,30.1) v1(77.22,85.09) v1(77.34,97.79) v1(77.47,39.12) v1(77.47,37.85) v1(77.72,41.53) v1(77.85,104.14) v1(77.85,36.7) v1(77.98,35.56) v1(77.98,34.54) v1(78.49,24.51) v1(78.87,74.04) v1(78.87,3.05) v1(78.99,31.24) v1(79.5,97.79) v1(79.76,34.42) v1(80.26,8.38) v1(80.52,6.35) v1(80.75,9.14) v1(80.77,81.53) v1(80.9,1.27) v1(81.28,8.38) v1(81.41,39.12) v1(81.53,36.7) v1(81.53,24.77) v1(81.53,6.35) v1(81.66,3.05) v1(82.04,54.99) v1(82.17,97.79) v1(82.17,93.85) v1(82.17,66.04) v1(82.3,63.25) v1(82.3,60.83) v1(82.3,58.04) v1(82.3,8.38) v1(82.42,77.22) v1(82.7,103.68) v1(82.68,31.5) v1(82.8,27.56) v1(82.93,68.33) v1(83.31,88.14) v1(83.69,38.61) v1(83.69,3.81) v1(83.77,103.71) v1(83.9,8.56) v1(84.2,31.37) v1(84.33,29.97) v1(84.79,103.71) v1(85.09,99.06) v1(85.09,24.77) v1(85.22,66.42) v1(85.22,1.4) v1(85.34,5.97) v1(85.47,70.74) v1(85.47,27.43) v1(85.9,103.71) v1(86.36,102.49) v1(86.61,4.06) v1(86.87,38.61) v1(87,83.31) v1(87,27.56) v1(87,10.92) v1(87.12,97.54) v1(87.12,80.14) v1(87.12,76.96) v1(87.38,8) v1(87.5,103.89) v1(87.63,87.5) v1(87.76,26.29) v1(88.01,1.65) v1(88.14,73.28) v1(88.52,68.33) v1(88.77,95.89) v1(88.77,88.9) v1(88.9,90.93) v1(89.28,24.51) v1(89.28,9.91) v1(89.28,6.35) v1(89.41,16.13) v1(89.66,14.61) v1(89.66,13.21) v1(89.79,82.42) v1(89.79,80.01) v1(89.79,29.59) v1(89.92,101.47) v1(89.92,46.61) v1(90.04,86.23) v1(90.17,90.42) v1(90.4,28.42) v1(90.55,94.49) v1(90.55,92.2) v1(90.93,3.43) v1(91.31,11.94) v1(91.31,1.14) v1(91.44,103.89) v1(91.57,76.58) v1(91.57,14.22) v1(91.57,6.73) v1(91.69,98.93) v1(92.08,70.99) v1(92.84,41.4) v1(92.96,50.04) v1(92.96,24.51) v1(93.22,44.96) v1(93.34,67.06) v1(93.34,13.84) v1(93.47,62.23) v1(94.23,80.14) v1(94.44,59) v1(94.49,91.19) v1(94.49,88.52) v1(94.61,96.65) v1(94.61,73.79) v1(94.74,84.45) v1(94.74,47.62) v1(94.89,54.31) v1(94.87,39.75) v1(95,51.94) v1(95,12.45) v1(95.25,17.53) v1(95.25,15.88) v1(95.89,60.2) v1(95.89,56.9) v1(96.01,51.05) v1(96.14,26.16) v1(96.27,77.47) v1(96.27,68.2) v1(96.39,86.61) v1(96.52,82.42) v1(96.52,54.36) v1(96.52,43.05) v1(96.52,24.51) v1(96.52,8.76) v1(96.65,37.97) v1(96.9,26.16) v1(97.16,91.31) v1(97.16,64.39) v1(97.28,95.25) v1(97.54,45.97) v1(97.79,51.94) v1(98.04,39.88) v1(98.04,38.1) v1(98.07,59.56) v1(98.09,54.33) v1(98.3,88.39) v1(98.3,71.5) v1(98.3,61.09) v1(98.42,84.2) v1(98.42,75.56) v1(98.55,93.34) v1(98.55,79.76) v1(98.55,49.66) v1(98.81,97.41) v1(98.93,24.51) v1(98.93,10.41) v1(98.93,7.49) v1(99.19,21.46) v1(99.19,18.41) v1(99.19,15.75) v1(99.19,13.21)
